# Altium PCB BMSPowerDistribution.PcbDoc (part 1 of 6)
Units mil, origin at the board's own origin, x right, y up, seen from the top; angles counter-clockwise.
Board outline 5328.74 x 5315 mil, 4 copper layers (Top Layer, Layer 1, Layer 2, Bottom Layer), stack 24.6 mil thick; 321 components, 209 nets, 1075 pads, 489 vias.
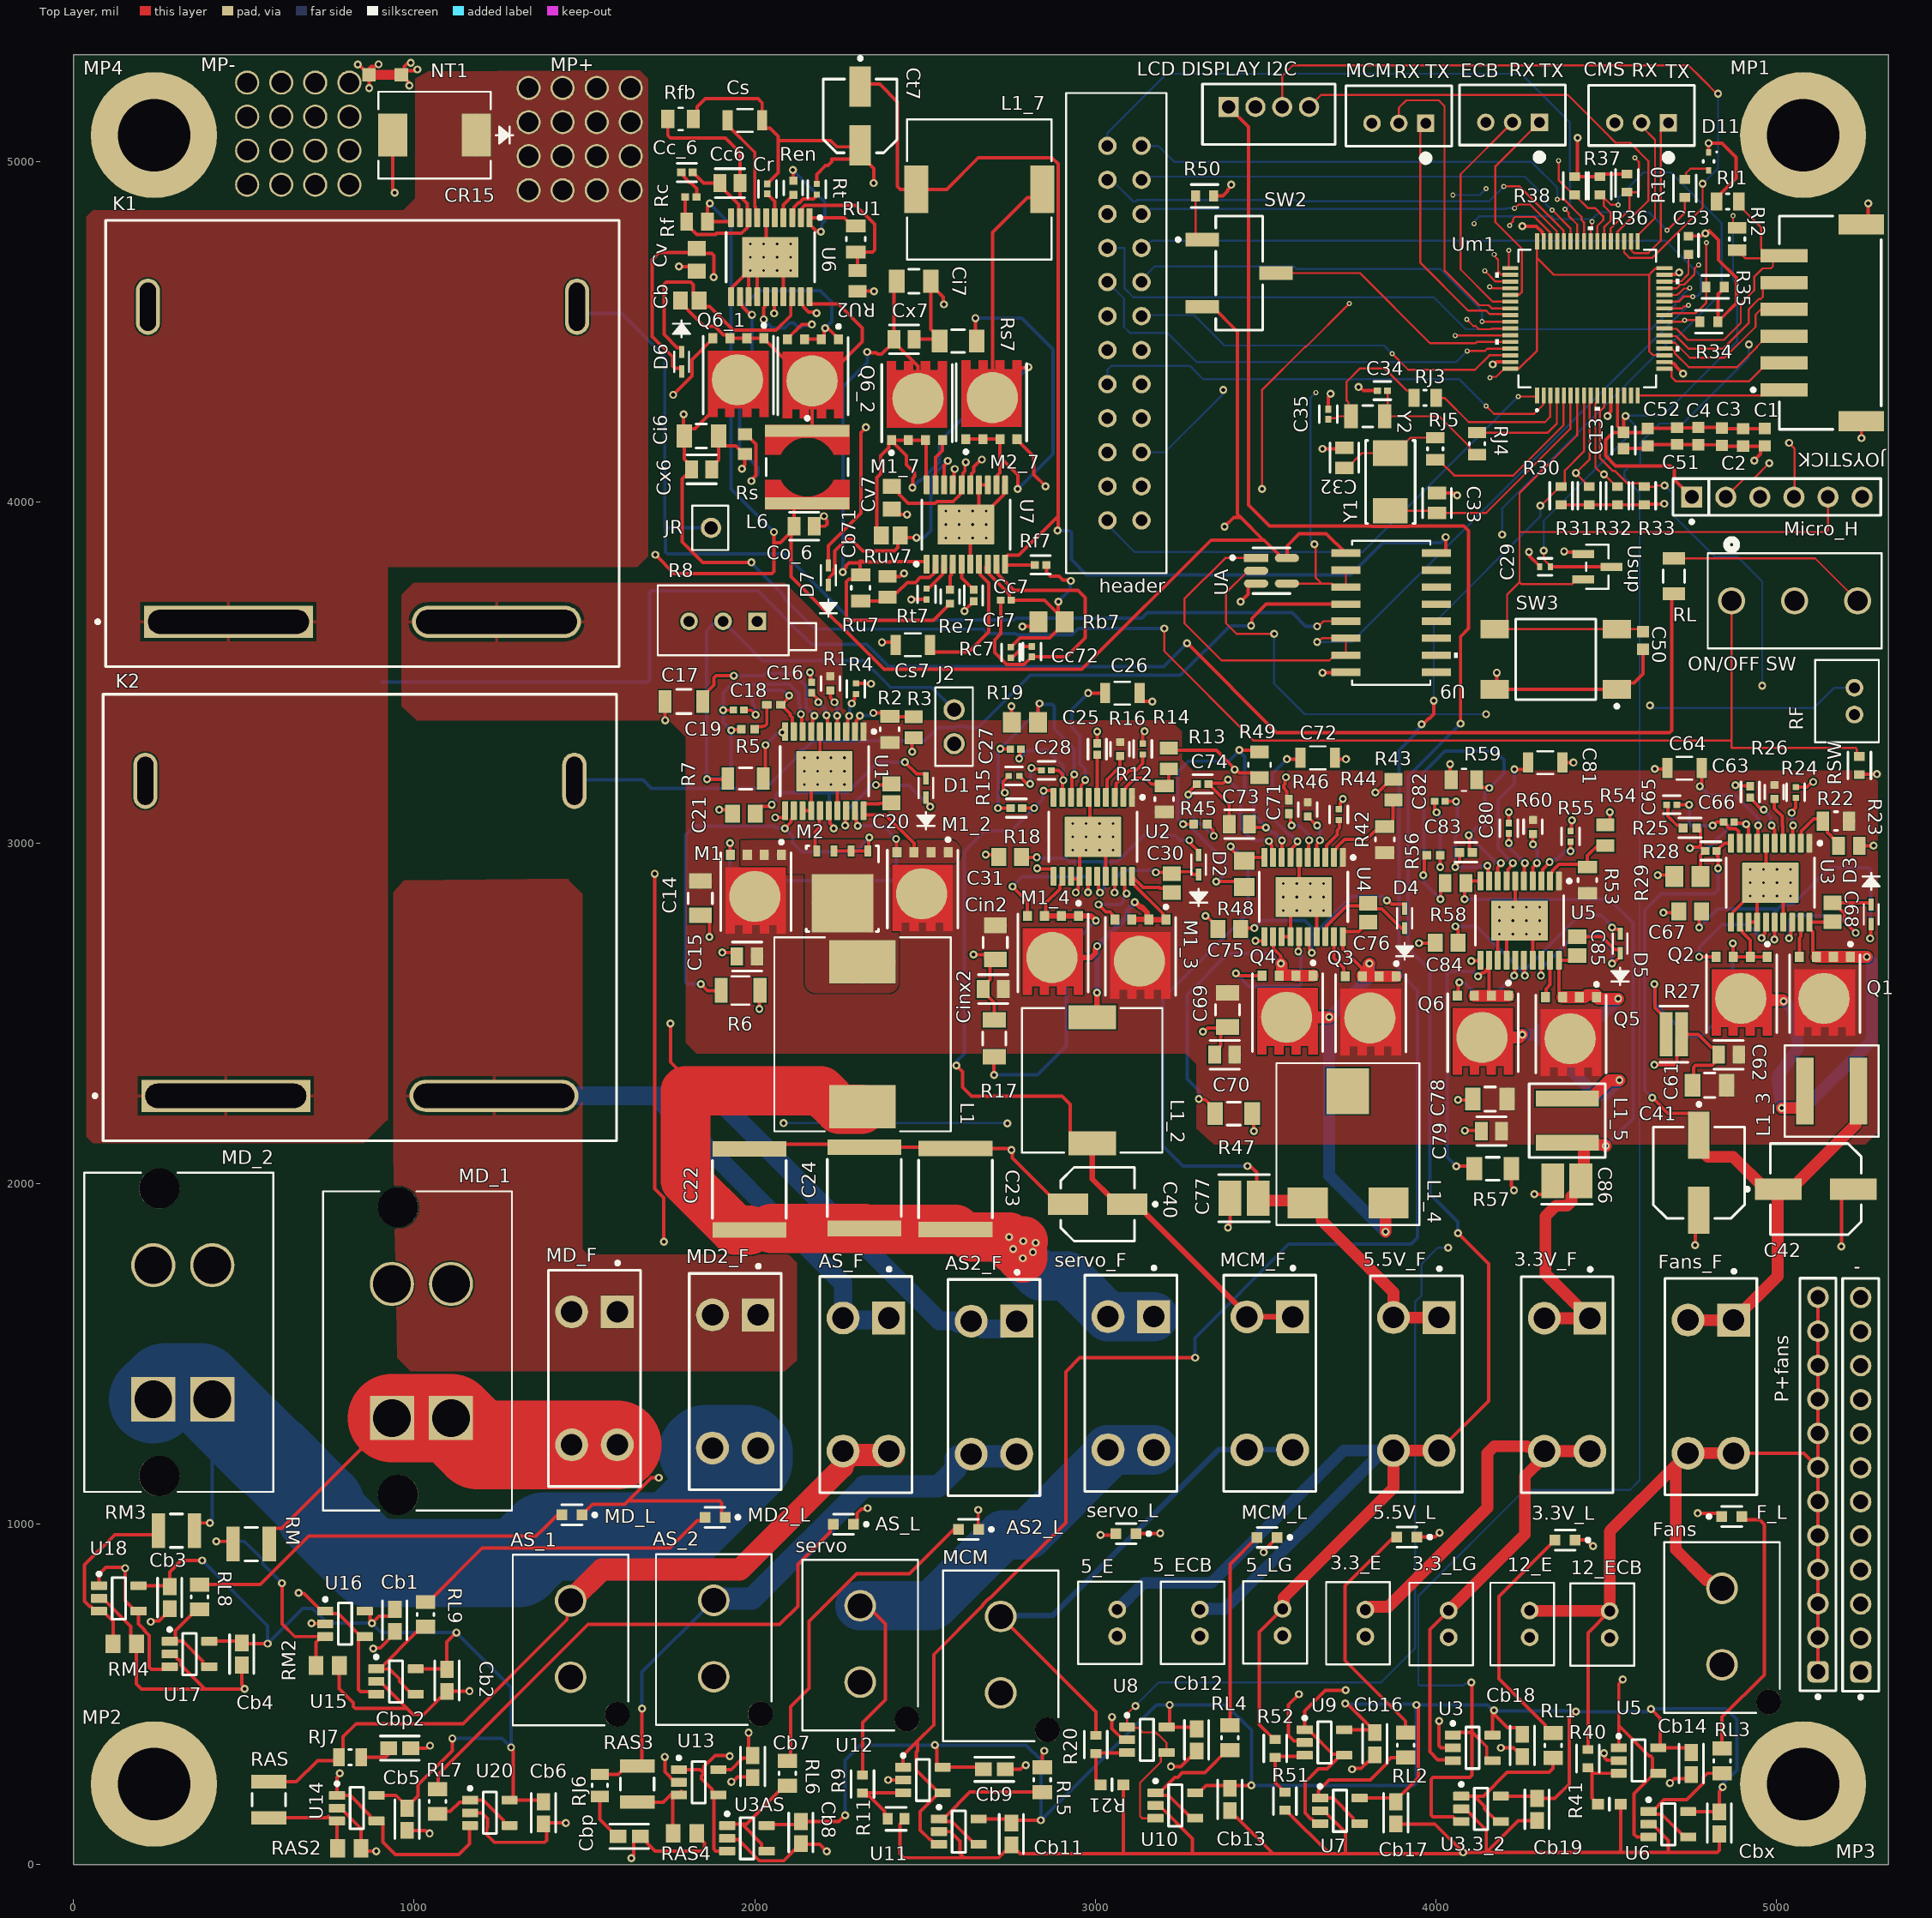
[diagram p0: Top Layer view]
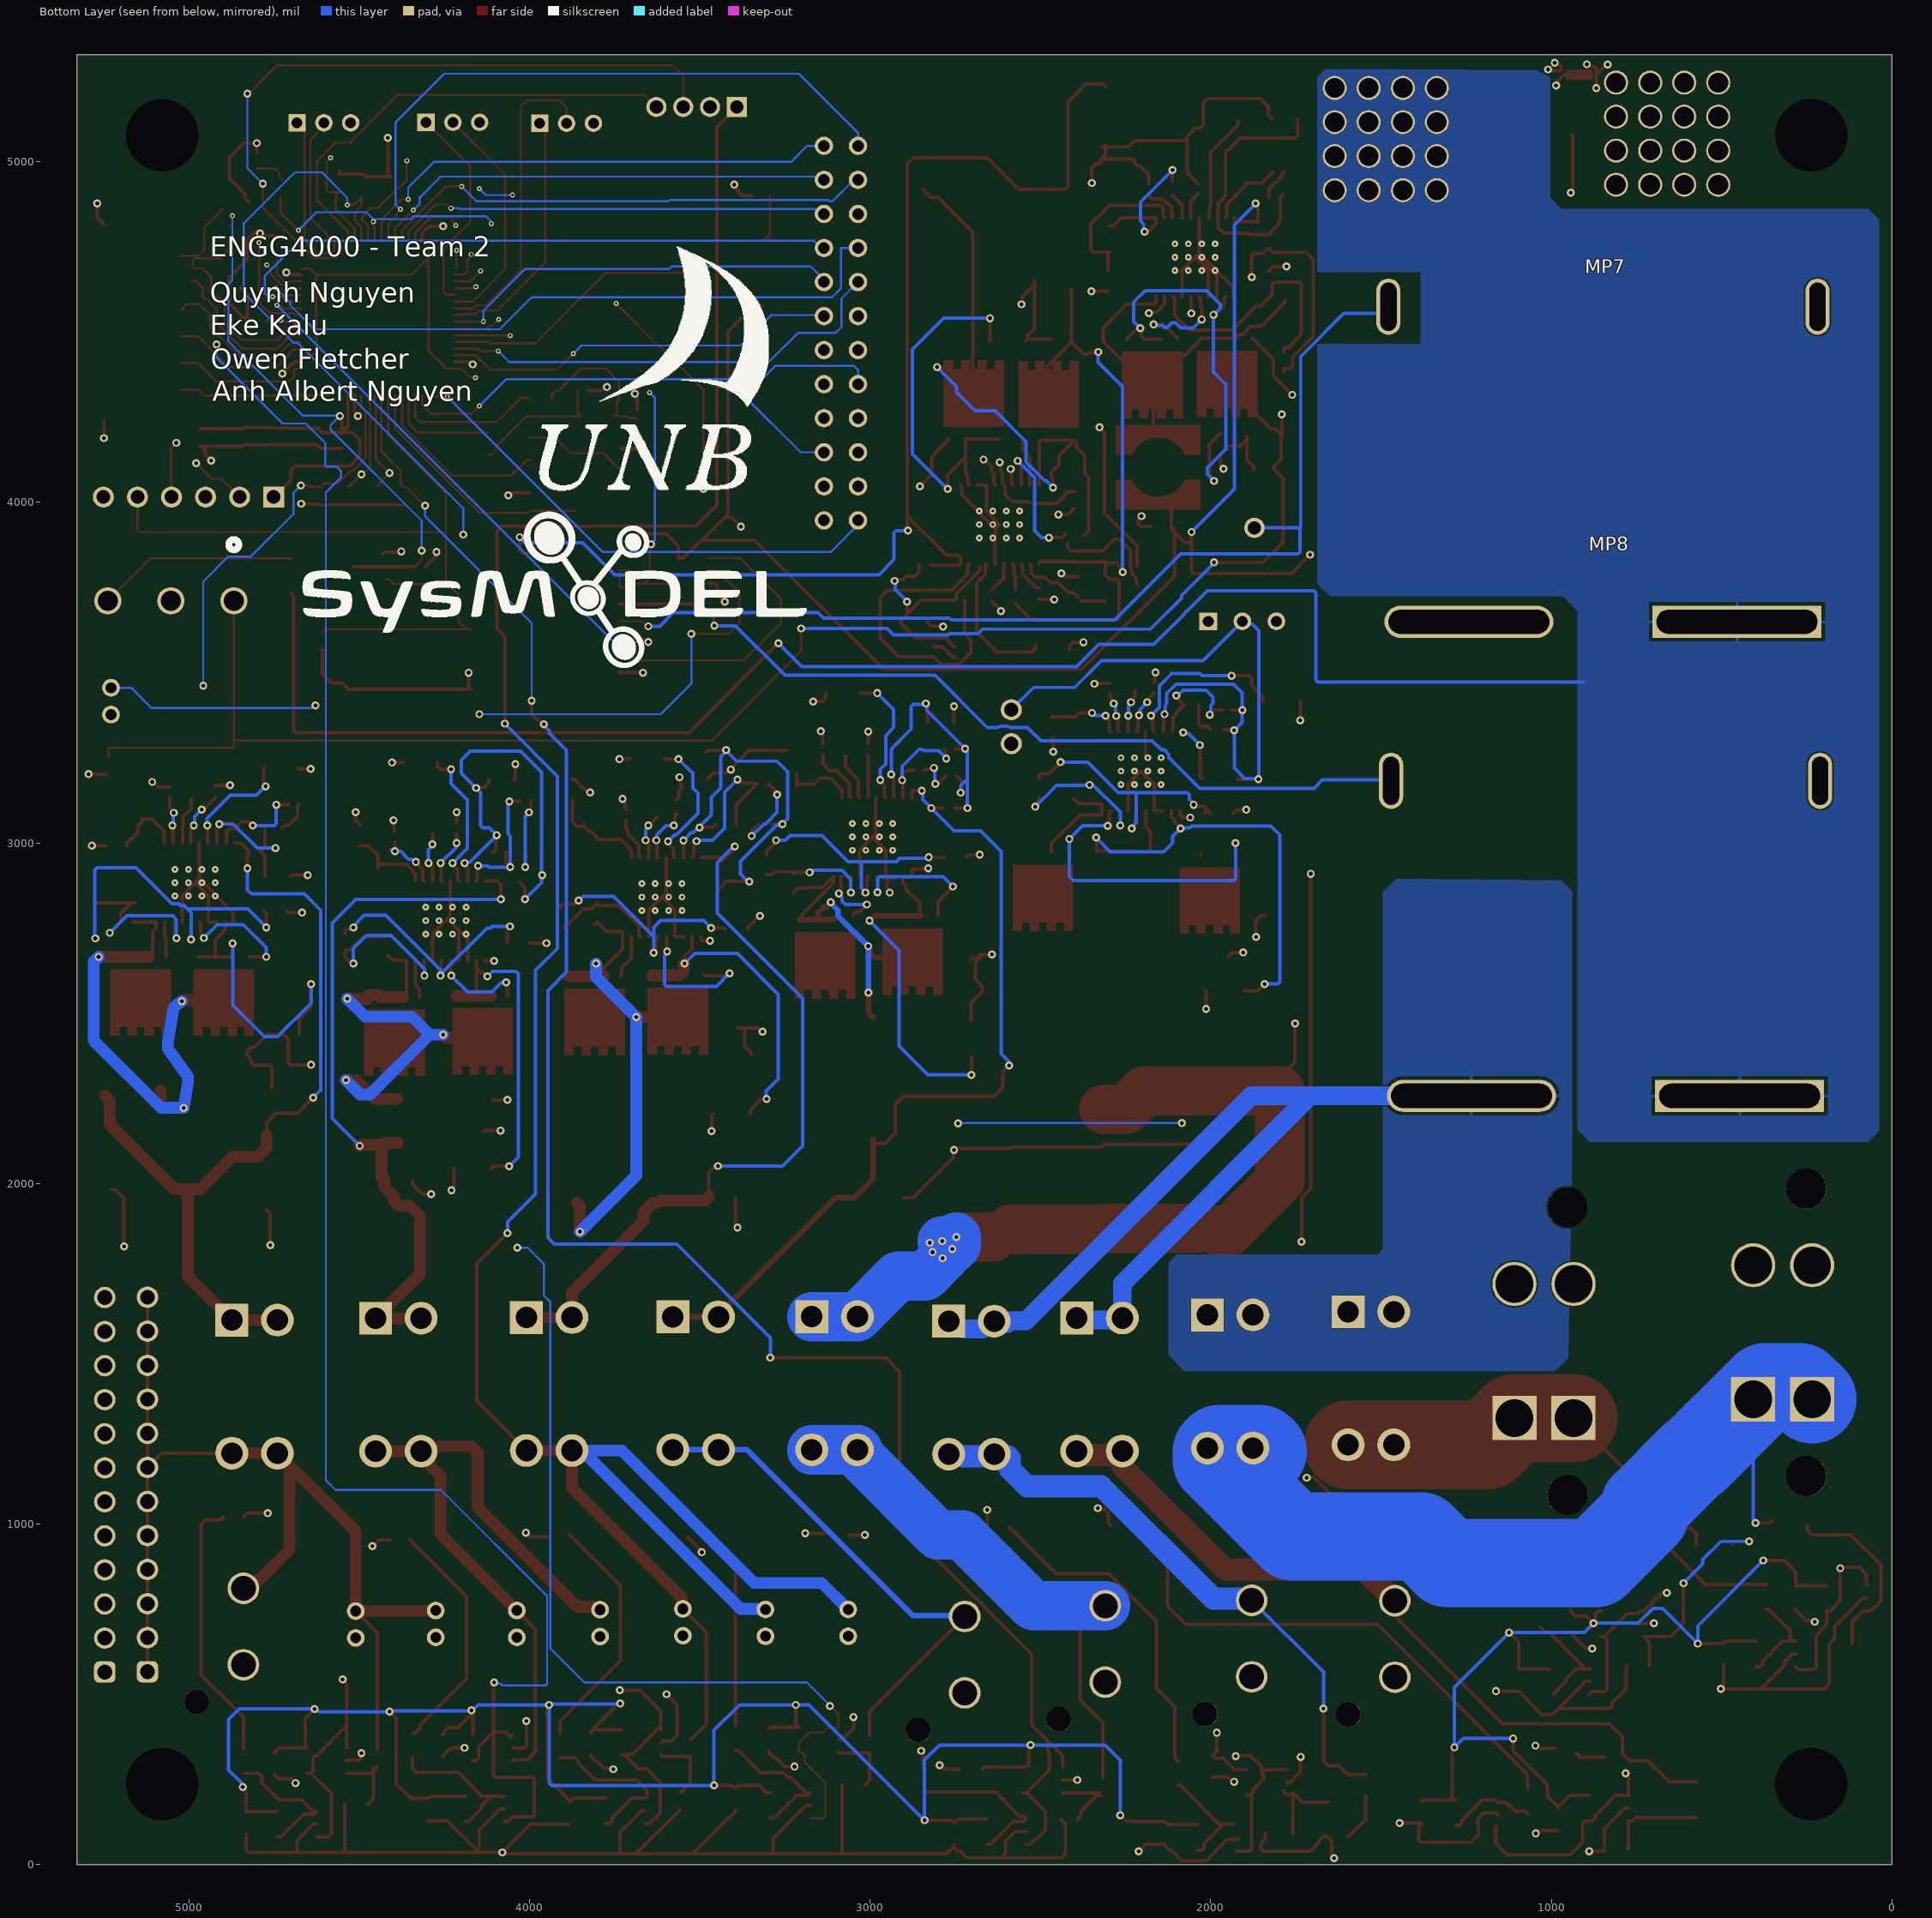
[diagram p1: Bottom Layer view, seen from below]
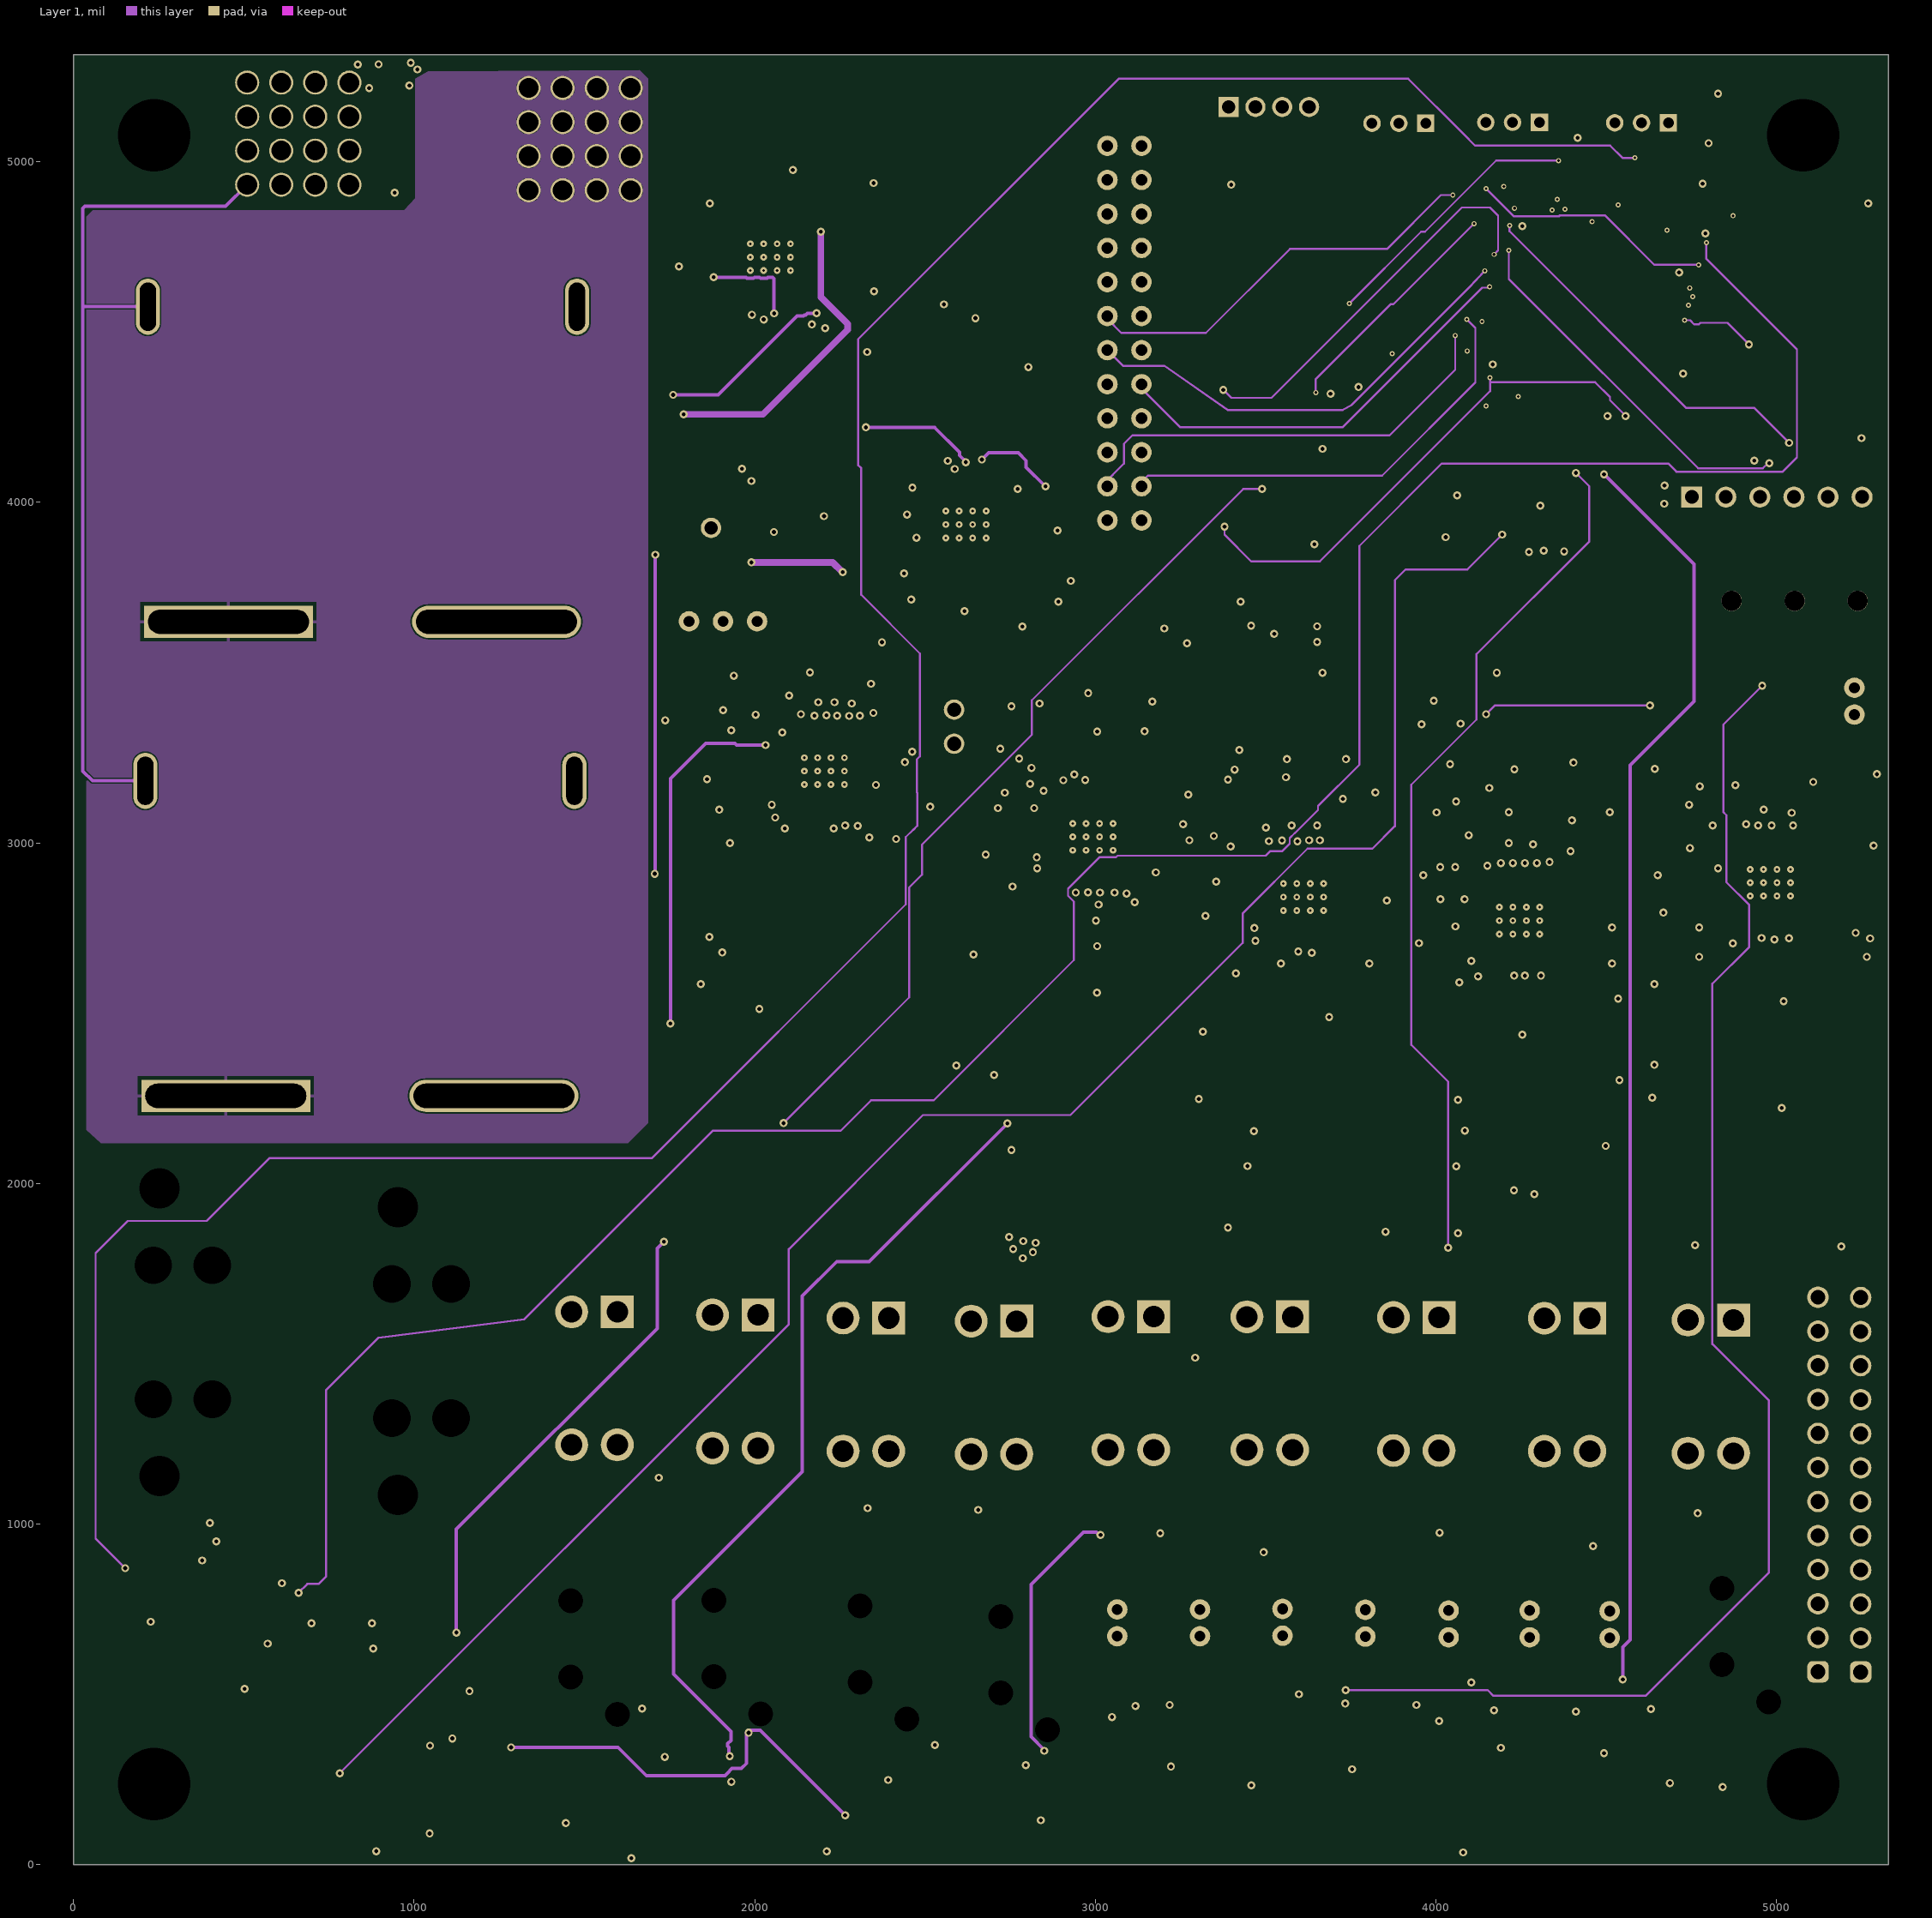
[diagram p2: Layer 1]
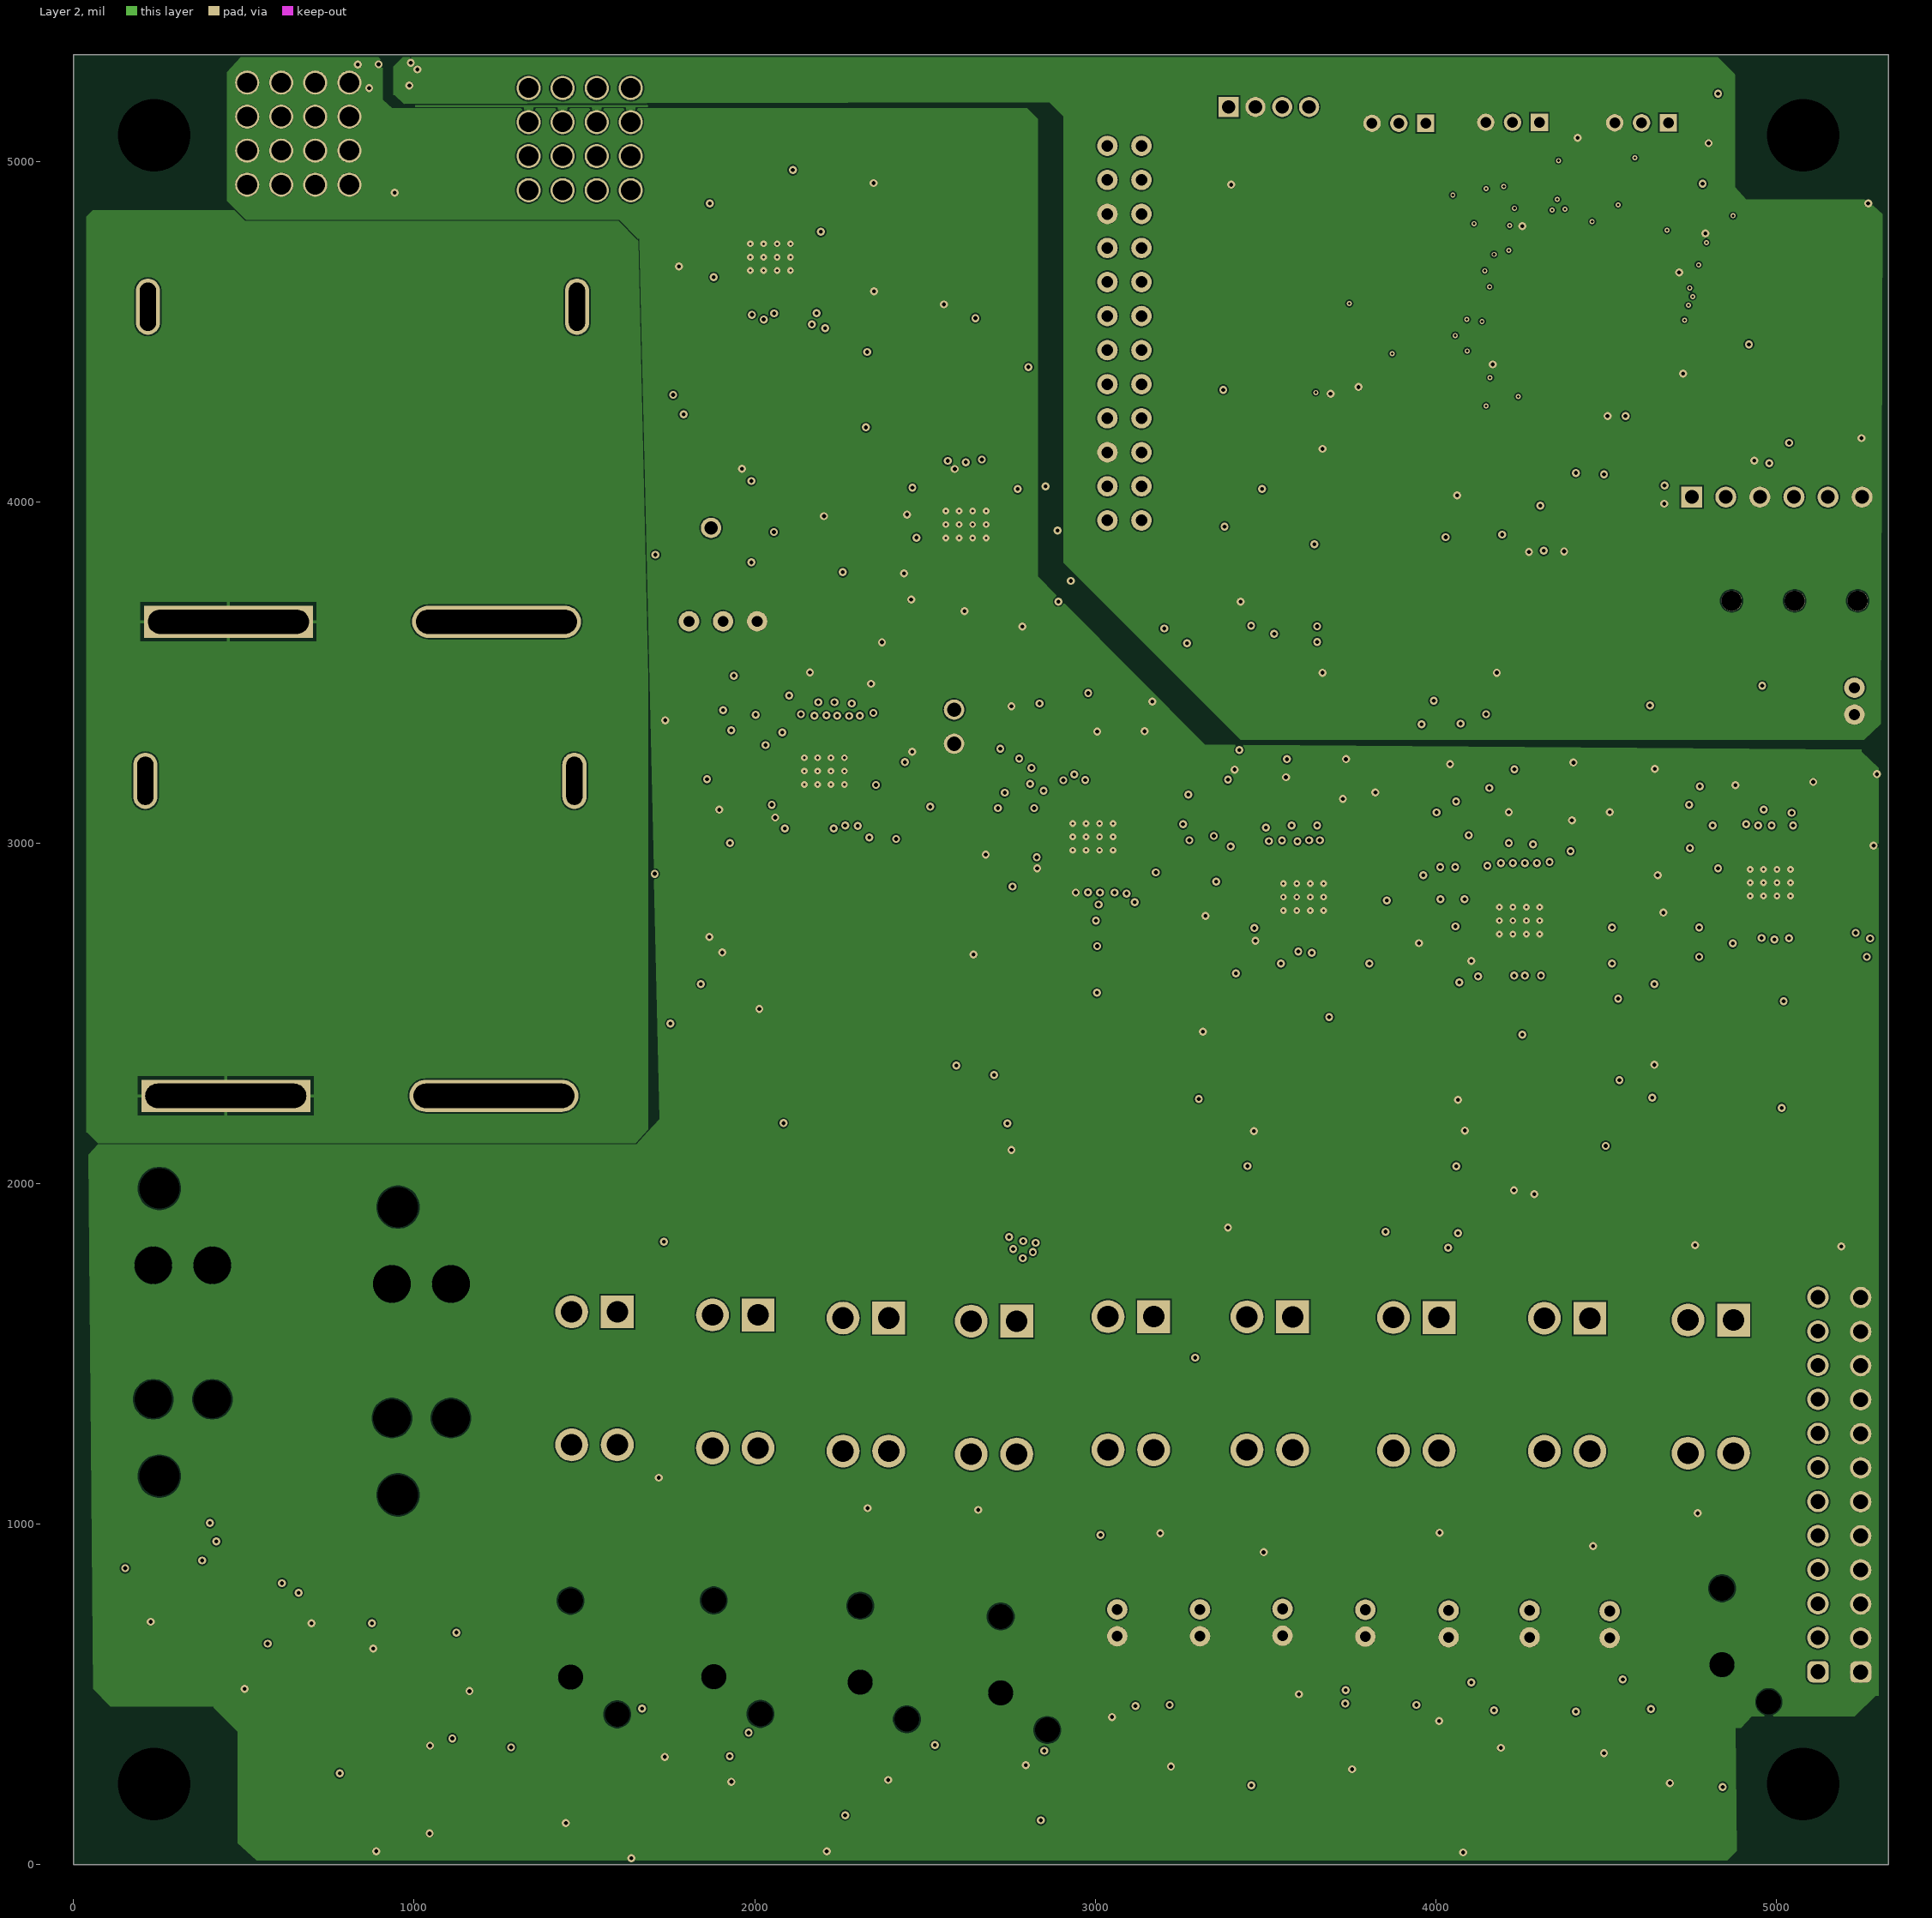
[diagram p3: Layer 2]
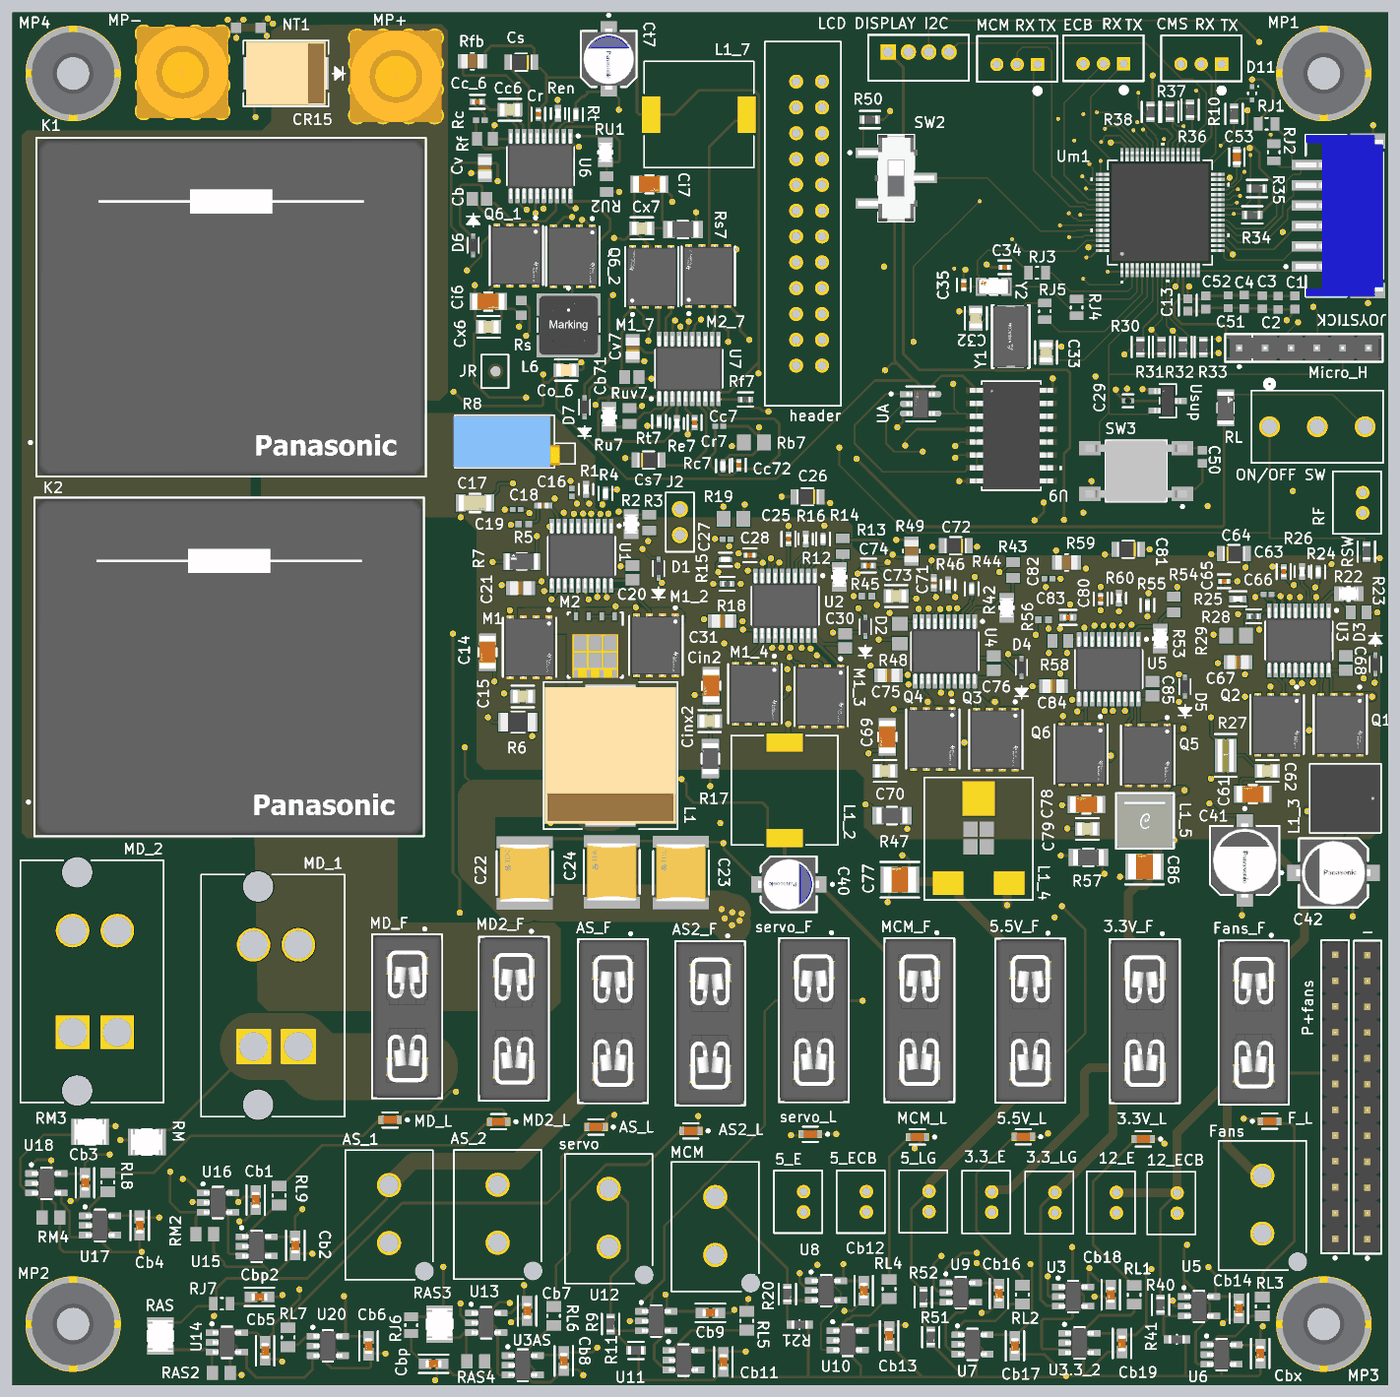
[diagram p8: 3D render of the assembled board from above, using the file's embedded part models]

## Layer stack, top to bottom
Top Solder: solder mask 0.4, Solder Resist, Dk 3.5
Top Layer: signal copper 1.6
Dielectric 2: prepreg 2.8, PP-006, Dk 4.1
Layer 1: signal copper 1.6
Dielectric 1: dielectric 12.6, FR-4, Dk 4.8
Layer 2: signal copper 1.6
Dielectric 3: prepreg 2.8, PP-006, Dk 4.1
Bottom Layer: signal copper 1.6
Bottom Solder: solder mask 0.4, Solder Resist, Dk 3.5

## Board outline
0,5315 0,0 5328.74,0 5328.74,5315

## Design rules (kind name [scope] priority, off if disabled: settings)
Clearance Polygon [ObjectKind = 'Poly'] p1: gap=15 ignorepadtopadclearanceinfootprint=TRUE
Clearance [All] p2: gap=4 ignorepadtopadclearanceinfootprint=TRUE except(5.91: SMDPad-SMDPad; 7.87: Arc-Via Track-Via SMDPad-Via THPad-Via Via-Via; 11.02: Arc-THPad Track-THPad SMDPad-THPad THPad-THPad)
Height [All] p1: minheight=0 maxheight=2000 prefheight=500
HoleSize [All] p1: absolutevalues=TRUE maxlimit=500 minlimit=1 maxpercent=80.000 minpercent=20.000
MinimumSolderMaskSliver [All] p1: minsoldermaskwidth=4
PlaneConnect [All] p1: planeconnectstyle=Direct reliefexpansion=20 reliefentries=4 reliefconductorwidth=10 reliefairgap=10
PolygonConnect [HasFootprint('FP-HE1AN-W-DC12V-Y6-MFG')] p1: connectstyle=Relief reliefconductorwidth=10 reliefentries=4 polygonreliefangle="90 Angle" airgapwidth=10
RoutingVias [All] p1: holewidth=15.98 width=34.02 viastyle="Through Hole" minholewidth=5.51 minwidth=9.45 maxholewidth=40 maxwidth=65
SilkToSolderMaskClearance [IsPad] p1: minsilkscreentomaskgap=5.91 clearancetoexposedcopper=TRUE
SolderMaskExpansion [All] p1: expansion=0.04 istentingtop=FALSE
SupplyNets "Schematic Supply Nets_5" [InNet('DGND')] p1: voltage=0.000
SupplyNets "Schematic Supply Nets_4" [InNet('+5')] p2: voltage=0.000
SupplyNets "Schematic Supply Nets_3" [InNet('12V_SUPPLY')] p3: voltage=0.000
SupplyNets "Schematic Supply Nets_2" [InNet('System+')] p4: voltage=0.000
SupplyNets "Schematic Supply Nets_1" [InNet('3.3+')] p5: voltage=0.000
SupplyNets "Schematic Supply Nets" [InNet('GND')] p6: voltage=0.000
Width [All] p1: maxlimit=270 minlimit=4 preferedwidth=10
25 further rules are at their usual default settings.

## Classes and differential pairs
component class Miccrocontroller: C1 C2 C3 C4 C13 C29 C32 C33 C34 C35 C50 C51 C52 C53 Cb Cb71 Cc6 Cc7 Cc72 Cc_6 Ci6 Ci7 CMS_U Co_6 Cr Cr7 Cs Cs7 Ct7 Cv Cv7 Cx6 Cx7 D6 D7 D11 ECB header JOYSTICK L1_7 L6 "LCD DISPLAY I2C" M1_7 M2_7 MCM Micro_H MP7 MP8 NT1 "ON/OFF SW" Q6_1 Q6_2 R10 R30 R31 R32 R33 R34 R35 R36 R37 R38 R50 Rb7 Rc Rc7 Re7 Ren Rf Rf7 Rfb RJ1 RJ2 RJ3 RJ4 RJ5 RL Rs Rs7 RSW Rt Rt7 RU1 RU2 Ru7 Ruv7 SW2 SW3 U6 U7 U9 Um1 Usup Y1 Y2
component class BuckConverters: 3.3_E 3.3_LG 3.3V_F 3.3V_L 5.5V_F 5.5V_L 5_E 5_ECB 5_LG 12_E 12_ECB - AS2_F AS2_L AS_1 AS_2 AS_F AS_L C14 C15 C16 C17 C18 C19 C20 C21 C22 C23 C24 C25 C26 C27 C28 C30 C31 C40 C41 C42 C61 C62 C63 C64 C65 C66 C67 C68 C69 C70 C71 C72 C73 C74 C75 C76 C77 C78 C79 C80 C81 C82 C83 C84 C85 C86 Cb1 Cb2 Cb3 Cb4 Cb5 Cb6 Cb7 Cb8 Cb9 Cb11 Cb12 Cb13 Cb14 Cb16 Cb17 Cb18 Cb19 Cbp Cbp2 Cbx Cin2 Cinx2 CR15 D1 D2 D3 D4 D5 F_L Fans Fans_F J2 JR K1 K2 L1 L1_2 L1_3 L1_4 L1_5 M1 M1_2 M1_3 M1_4 M2 MCM MCM_F MCM_L MD2_F MD2_L MD_1 MD_2 MD_F MP1 MP2 MP3 MP4 MP+ MP- P+fans Q1 Q2 Q3 Q4 Q5 Q6 R1 R2 R3 R4 R5 R6 R7 R8 R9 R11 R12 R13 R14 R15 R16 R17 R18 R19 R20 R21 R22 R23 R24 R25 R26 R27 R28 R29 R40 R41 R42 R43 R44 R45 R46 R47 R48 R49 R51 R52 R53 R54 R55 R56 R57 R58 R59 R60 RAS RAS2 RAS3 RAS4 Rcomp5 RF RJ6 RJ7 RL1 RL2 RL3 RL4 RL5 RL6 RL7 RL8 RL9 RM RM2 RM3 RM4 servo servo_F servo_L U1 U2 U3 U3.3_2 U3AS U4 U5 U6 U7 U8 U9 U10 U11 U12 U13 U14 U15 U16 U17 U18 U20 UA

## Components (designator, comment, footprint, x,y, rotation, side; value= is the part's Value field where it differs from the comment)
3.3_E "B2B-PH-K-SLFSN" CONN_B2B-PH-K-SLFSN_JST 3793.31,748.03 r90 top
3.3_LG "B2B-PH-K-SLFSN" CONN_B2B-PH-K-SLFSN_JST 4037.72,745.74 r90 top
3.3V_F "3568" FP-3568-MFG 4385.72,1409 r270 top
3.3V_L "LS L29K-H1J2-1-Z" FP-LS_L29K-MFG 4379.92,952.76 r180 top
5.5V_F "3568" FP-3568-MFG 3942.72,1411 r270 top
5.5V_L "LS L29K-H1J2-1-Z" FP-LS_L29K-MFG 3915.35,961.61 r180 top
5_E "B2B-PH-K-SLFSN" CONN_B2B-PH-K-SLFSN_JST 3064.68,748.94 r90 top
5_ECB "B2B-PH-K-SLFSN" CONN_B2B-PH-K-SLFSN_JST 3307.68,748.94 r90 top
5_LG "B2B-PH-K-SLFSN" CONN_B2B-PH-K-SLFSN_JST 3550.08,750.54 r90 top
12_E "B2B-PH-K-SLFSN" CONN_B2B-PH-K-SLFSN_JST 4275.72,745.74 r90 top
12_ECB "B2B-PH-K-SLFSN" CONN_B2B-PH-K-SLFSN_JST 4510.72,744 r90 top
- "61301211121" 61301211121 5247.72,1115 r90 top
AS2_F "3568" FP-3568-MFG 2702.76,1400.59 r270 top
AS2_L "LS L29K-H1J2-1-Z" FP-LS_L29K-MFG 2627.95,984.25 r180 top
AS_1 "1720650202" CONN_SD-768290002_02_MOL 1459.45,774.41 r180 top
AS_2 "1720650202" CONN_SD-768290002_02_MOL 1879.92,775.59 r180 top
AS_F "3568" FP-3568-MFG 2326.77,1409.45 r270 top
AS_L "LS L29K-H1J2-1-Z" FP-LS_L29K-MFG 2260.83,999.02 r180 top
C1 "06035C104KAT4A" CAPC1608X90X35LL15T15 4966.54,4191.93 r90 top
C2 "06035C104KAT4A" CAPC1608X90X35LL15T15 4902.56,4190.94 r90 top
C3 "06035C104KAT4A" CAPC1608X90X35LL15T15 4840.55,4192.91 r90 top
C4 "06035C104KAT4A" CAPC1608X90X35LL15T15 4770.67,4194.88 r90 top
C13 "GRM188R61E475KE11D" FP-GRM188-0_15-IPC_C 4551.72,4182 r270 top
C14 "GRM31CR71H475KA12L" FP-GRM31C-0_2-e0_3_0_8-IPC_C 1840.55,2837.63 r270 top
C15 "C0805C104M5RACTU" FP-C0805C-DN-MFG 1977.33,2666.42 r180 top value="0.10 μF"
C16 "GRM1555C1H301GA01D" CAPC1005X55X25LL05T10 2167.32,3456.3 r270 top
C17 "C1206C333J1GACTU" FP-C1206C-EB-MFG 1792.32,3415.35 r180 top value="33,000 pF"
C18 "UMK105CG181JV-F" "CAP_UMK105 CG080CV-F_TAY" 2056.27,3405.51 r0 top
C19 "GRM1555C1E5R1CA01D" CAPC1005X55X25LL05T10 1953.2,3390.25 r180 top
C20 "08053C104K4T2A" CAPC2013X140X50LL20T25 2401.57,3145.67 r90 top
C21 "TMK212BJ105KG-T" CAP_TMK212BJ105KG-T_TAY 1968.63,3085.63 r0 top
C22 "CGA9N3X7R1C476M230KB" FP-CGA9P-IPC_A 1984.25,1982.28 r90 top
C23 "CGA9N3X7R1C476M230KB" FP-CGA9P-IPC_A 2589.72,1984 r90 top
C24 "CGA9N3X7R1C476M230KB" FP-CGA9P-IPC_A 2321.72,1987 r90 top
C25 "UMK105CG271JV-F" FP-0402-L_1_0_0_05-W_0_5-IPC_B 3005.91,3275.59 r90 top
C26 "CGA4J2C0G1H333J125AA" CAP_2012_TDK-M 3079.65,3439.85 r180 top
C27 "GRM1555C1E5R1CA01D" CAPC1005X55X25LL05T10 2766.14,3275.59 r180 top
C28 "GRM1555C1H101FA01D" FP-GRM155-0_05-IPC_C 2856.72,3213 r0 top
C29 "GRM155R71C104KA88D" FP-GRM15-MFG 4320.87,3811.02 r180 top value=0.10μF
C30 "08053C104K4T2A" CAPC2013X140X50LL20T25 3225.39,2881.89 r90 top
C31 "TMK212BJ105KG-T" CAP_TMK212BJ105KG-T_TAY 2750.06,2958.5 r0 top
C32 "C0805C180J5GACTU" FP-C0805C-DN-MFG 3731.56,4131 r270 top value="18 pF"
C33 "C0805C180J5GACTU" FP-C0805C-DN-MFG 4003.56,3998.53 r270 top value="18 pF"
C34 "GJM1555C1H1R5BB01D" FP-GJM155-0_05-IPC_C 3843.56,4328 r0 top
C35 "GJM1555C1H1R5BB01D" FP-GJM155-0_05-IPC_C 3684.56,4258.9 r270 top
C40 "25SVPF27MX" FP-OS-CON-SMT-B6-MFG 3006.89,1938.98 r180 top
C41 "35SVPF22M" FP-OS-CON-SMT-C6-MFG 4772.7,2031.52 r270 top
C42 "35SVPF22M" FP-OS-CON-SMT-C6-MFG 5115.94,1983.29 r0 top
C50 "06035C104KAT4A" CAPC1608X90X35LL15T15 4608.27,3594.49 r90 top
C51 "C0603C105K3RACTU" CAPC1608X87X35LL15T15 4708.66,4194.88 r90 top
C52 "06035C104KAT4A" CAPC1608X90X35LL15T15 4622.05,4191.93 r270 top
C53 "GRM188R71A225KE15D" FP-GRM188-0_1-e0_2_0_5-MFG 4742.13,4754.92 r90 top
C61 "GRM31CR71H475KA12L" FP-GRM31C-0_2-e0_3_0_8-IPC_C 4804.13,2288.39 r180 top
C62 "C0805C104M5RACTU" FP-C0805C-DN-MFG 4860.24,2377.95 r180 top value="0.10 μF"
C63 "UMK105CG271JV-F" FP-0402-L_1_0_0_05-W_0_5-IPC_B 4923.23,3149.61 r90 top
C64 "CGA4J2C0G1H333J125AA" CAP_2012_TDK-M 4730.31,3219.49 r0 top
C65 "GRM1555C1H101FA01D" FP-GRM155-0_05-IPC_C 4692.91,3112.2 r0 top
C66 "GRM1555C1E5R1CA01D" CAPC1005X55X25LL05T10 4860.74,3061.44 r0 top
C67 "TMK212BJ105KG-T" CAP_TMK212BJ105KG-T_TAY 4746.64,2799.22 r0 top
C68 "08053C104K4T2A" CAPC2013X140X50LL20T25 5164.64,2796.22 r90 top
C69 "GRM31CR71H475KA12L" FP-GRM31C-0_2-e0_3_0_8-IPC_C 3388.72,2509.77 r270 top
C70 "C0805C104M5RACTU" FP-C0805C-DN-MFG 3379.92,2377.95 r180 top value="0.10 μF"
C71 "UMK105CG181JV-F" "CAP_UMK105 CG080CV-F_TAY" 3568.9,3106.3 r270 top
C72 "CGA4J2C0G1H333J125AA" CAP_2012_TDK-M 3653.54,3250 r180 top
C73 "C0805C100M4GACTU" FP-C0805C-DN-MFG 3423.23,3055.12 r180 top value="10 pF"
C74 "UMK105CG271JV-F" FP-0402-L_1_0_0_05-W_0_5-IPC_B 3315.8,3173.23 r0 top
C75 "TMK212BJ105KG-T" CAP_TMK212BJ105KG-T_TAY 3393.57,2747.33 r0 top
C76 "08053C104K4T2A" CAPC2013X140X50LL20T25 3801.18,2795.28 r90 top
C77 "GRM32ER61C476KE15L" FP-GRM32E-0_3-0_2-IPC_C 3436.98,1956.69 r180 top
C78 "GRM31CR71H475KA12L" FP-GRM31C-0_2-e0_3_0_8-IPC_C 4159.45,2248.03 r180 top
C79 "C0805C104M5RACTU" FP-C0805C-DN-MFG 4163.39,2153.54 r180 top value="0.10 μF"
C80 "GRM1555C1H101FA01D" FP-GRM155-0_05-IPC_C 4214.57,3043.31 r90 top
C81 "CGA4J2C0G1H333J125AA" CAP_2012_TDK-M 4321.72,3236 r180 top
C82 "GRM1555C1E120JA01D" CAPC1005X55X25LL05T10 4012.33,3122.04 r0 top
C83 "GRM1555C1H391JA01J" FP-GRM155-0_05-IPC_A 4088.58,2972.44 r180 top
C84 "TMK212BJ105KG-T" CAP_TMK212BJ105KG-T_TAY 4032.16,2706.5 r0 top
C85 "08053C104K4T2A" CAPC2013X140X50LL20T25 4415.35,2696.85 r90 top
C86 "GRM32ER61C476KE15L" FP-GRM32E-0_3-0_2-IPC_C 4384.79,2007.5 r180 top
Cb "08053C104K4T2A" CAPC2013X140X50LL20T25 1809.44,4593.13 r0 top
Cb1 "GCJ188R72A104KA01D" FP-GCJ188-0_2-IPC_A 943.24,716.69 r270 top
Cb2 "GCJ188R72A104KA01D" FP-GCJ188-0_2-IPC_A 1096.46,540.34 r270 top
Cb3 "GCJ188R72A104KA01D" FP-GCJ188-0_2-IPC_A 282.48,783.48 r270 top
Cb4 "GCJ188R72A104KA01D" FP-GCJ188-0_2-IPC_A 494.09,618.11 r270 top
Cb5 "GCJ188R72A104KA01D" FP-GCJ188-0_2-IPC_A 979.72,132.5 r270 top
Cb6 "GCJ188R72A104KA01D" FP-GCJ188-0_2-IPC_A 1379.98,151.61 r270 top
Cb7 "GCJ188R72A104KA01D" FP-GCJ188-0_2-IPC_A 1994.09,287.38 r270 top
Cb8 "GCJ188R72A104KA01D" FP-GCJ188-0_2-IPC_A 2135.83,93.48 r270 top
Cb9 "GCJ188R72A104KA01D" FP-GCJ188-0_2-IPC_A 2703.76,279.53 r0 top
Cb11 "GCJ188R72A104KA01D" FP-GCJ188-0_2-IPC_A 2753.94,89.55 r270 top
Cb12 "GCJ188R72A104KA01D" FP-GCJ188-0_2-IPC_A 3297.57,365.64 r270 top
Cb13 "GCJ188R72A104KA01D" FP-GCJ188-0_2-IPC_A 3395.67,190.94 r270 top
Cb14 "GCJ188R72A104KA01D" FP-GCJ188-0_2-IPC_A 4750,296.28 r270 top
Cb16 "GCJ188R72A104KA01D" FP-GCJ188-0_2-IPC_A 3820.87,354.33 r270 top
Cb17 "GCJ188R72A104KA01D" FP-GCJ188-0_2-IPC_A 3882.87,151.57 r270 top
Cb18 "GCJ188R72A104KA01D" FP-GCJ188-0_2-IPC_A 4253.94,349.39 r270 top
Cb19 "GCJ188R72A104KA01D" FP-GCJ188-0_2-IPC_A 4297.24,161.42 r270 top
Cb71 "08053C104K4T2A" CAPC2013X140X50LL20T25 2399.61,3902.56 r0 top
Cbp "GCJ188R72A104KA01D" FP-GCJ188-0_2-IPC_A 1631.89,82.68 r0 top
Cbp2 "GCJ188R72A104KA01D" FP-GCJ188-0_2-IPC_A 957.66,341.54 r0 top
Cbx "GCJ188R72A104KA01D" FP-GCJ188-0_2-IPC_A 4832.68,122.05 r270 top (schematic designator Cb15)
Cc6 "C0805C100M4GACTU" FP-C0805C-DN-MFG 1927.51,4937.85 r180 top value="10 pF"
Cc7 "GRM1555C1E5R1CA01D" CAPC1005X55X25LL05T10 2738.19,3712.6 r0 top
Cc72 "GRM1555C1H101FA01D" FP-GRM155-0_05-IPC_C 2813.97,3562.06 r270 top
Cc_6 "UMK105CG271JV-F" FP-0402-L_1_0_0_05-W_0_5-IPC_B 1801.38,4968.85 r0 top
Ci6 "GRM31CR71H475KA12L" FP-GRM31C-0_2-e0_3_0_8-IPC_C 1843.44,4195.13 r0 top
Ci7 "GRM31CR71H475KA12L" FP-GRM31C-0_2-e0_3_0_8-IPC_C 2467.52,4649.58 r0 top
Cin2 "GRM31CR71H475KA12L" FP-GRM31C-0_2-e0_3_0_8-IPC_C 2706.69,2707.71 r270 top
Cinx2 "C0805C104M5RACTU" FP-C0805C-DN-MFG 2700.79,2570.87 r180 top value="0.10 μF"
CMS "B3B-PH-K-S(LF)(SN)" JST-B3B-PH-K-S-3_V 4604.3,5136.65 r180 top (schematic designator J16)
Co_6 "C0805C475K8PACTU" FP-C0805C475K8PACTU-MFG 2145.44,3930.13 r0 top
Cr "GRM1555C1H101FA01D" FP-GRM155-0_05-IPC_C 2037.51,4920.85 r90 top
Cr7 "UMK105CG271JV-F" FP-0402-L_1_0_0_05-W_0_5-IPC_B 2642.72,3726.89 r270 top
CR15 "SMCJ75A-13-F" SMC_DIO 1059.95,5078.74 r180 top
Cs "CGA4J2C0G1H333J125AA" CAP_2012_TDK-M 1971.46,5122.05 r180 top
Cs7 "CGA4J2C0G1H333J125AA" CAP_2012_TDK-M 2464.57,3581.69 r0 top
Ct7 "25SVPF27MX" FP-OS-CON-SMT-B6-MFG 2310.04,5134.84 r270 top
Cv "TMK212BJ105KG-T" CAP_TMK212BJ105KG-T_TAY 1830.44,4713.13 r90 top
Cv7 "TMK212BJ105KG-T" CAP_TMK212BJ105KG-T_TAY 2402.56,4013.91 r90 top
Cx6 "C0805C104M5RACTU" FP-C0805C-DN-MFG 1844.44,4097.13 r0 top value="0.10 μF"
Cx7 "C0805C104M5RACTU" FP-C0805C-DN-MFG 2438.44,4479.13 r0 top value="0.10 μF"
D1 "BAS516" SOD523_NEX 2502.95,3161.42 r90 top
D2 "BAS516" SOD523_NEX 3303.64,2936.02 r90 top
D3 "BAS516" SOD523_NEX 5278.54,2790.35 r270 top
D4 "BAS516" SOD523_NEX 3908.46,2778.54 r90 top
D5 "BAS516" SOD523_NEX 4541.34,2704.72 r90 top
D6 "BAS516" SOD523_NEX 1785.43,4413.39 r270 top
D7 "BAS516" SOD523_NEX 2216.44,3786.13 r90 top
D11 "RB521S30T1G" ONSC-SOD-523-2-502-01_V 4801.18,5001.57 r270 top
ECB "B3B-PH-K-S(LF)(SN)" JST-B3B-PH-K-S-3_V 4225.56,5138 r180 top (schematic designator J14)
F_L "LS L29K-H1J2-1-Z" FP-LS_L29K-MFG 4869.09,1021.65 r0 top (schematic designator Fans_L)
Fans "1720650202" CONN_SD-768290002_02_MOL 4840.72,811 r180 top
Fans_F "3568" FP-3568-MFG 4807.65,1403.28 r270 top
header "SFH11-PBPC-D12-ST-BK" CONN_SFH11-PBPC-D12-ST-BK 3135.83,5047.24 r270 top
J2 "PPTC021LFBN-RC" "CONN2_LFBN-RC_SUL - DUPLICATE" 2585.63,3391.34 r270 top
JOYSTICK "S6B-PH-SM4-TB(LF)(SN)" JST-S6B-PH-SM4-TB(LF)(SN)_V 5135.83,4527.56 r90 top (schematic designator J15)
JR "SSQ-101-03-G-S" CON1_1X1_TU_SSQ 1872.05,3925.2 r90 top
K1 "HE1AN-W-DC12V-Y6" FP-HE1AN-W-DC12V-Y6-MFG 848.43,4173.23 r180 top
K2 "HE1AN-W-DC12V-Y6" FP-HE1AN-W-DC12V-Y6-MFG 840.72,2781 r180 top
L1 "IHLP5050FDER1R8M01" IND_IHLP_5050_FD_VIS 2316.93,2437.99 r90 top
L1_2 "MSS1038-123MLB" IND_MSS1038_COC 2991.14,2303.15 r90 top
L1_3 "XAL6060-562MEB" IND_XAL6060_COC 5162.4,2271.65 r180 top
L1_4 "SER1052-402MLB" IND_SER1052_COC 3742.13,2118.11 r90 top
L1_5 "XAL5030-222MEB" FP-XAL5030-222MEB-MFG 4386.16,2184.5 r270 top
L1_7 "MSS1038-123MLB" IND_MSS1038_COC 2659.45,4919.29 r0 top
L6 "744053270" WE-TPC_5828 2154.44,4103.43 r0 top
"LCD DISPLAY I2C" "B4B-PH-K-S(LF)(SN)" JST-B4B-PH-K-S_V 3509.84,5139.76 r0 top (schematic designator J17)
M1 "CSD18537NQ5A" FP-DQJ0008A-MFG 2003.48,2856.78 r270 top
M1_2 "CSD18537NQ5A" FP-DQJ0008A-MFG 2492.92,2864.17 r270 top
M1_3 "CSD18537NQ5A" FP-DQJ0008A-MFG 3132.68,2666.34 r270 top
M1_4 "CSD18537NQ5A" FP-DQJ0008A-MFG 2875.98,2677.17 r270 top
M1_7 "CSD18537NQ5A" FP-DQJ0008A-MFG 2476.68,4291.36 r90 top
M2 "CSD16556Q5B" DNK0008A 2257.87,2865.35 r270 top
M2_7 "CSD18537NQ5A" FP-DQJ0008A-MFG 2695.44,4294.13 r90 top
MCM "B3B-PH-K-S(LF)(SN)" JST-B3B-PH-K-S-3_V 3891.56,5134.99 r180 top (schematic designator J13)
MCM "1720650202" CONN_SD-768290002_02_MOL 2722.44,728.35 r180 top (schematic designator J8)
MCM_F "3568" FP-3568-MFG 3512.72,1413 r270 top
MCM_L "LS L29K-H1J2-1-Z" FP-LS_L29K-MFG 3504.92,960.63 r180 top
MD2_F "3568" FP-3568-MFG 1942.91,1418.31 r270 top
MD2_L "LS L29K-H1J2-1-Z" FP-LS_L29K-MFG 1883.86,1019.68 r180 top (schematic designator MD_L)
MD_1 "428192233" CON_428192233 1108.27,1311.02 r270 top
MD_2 "428192233" CON_428192233 407.48,1366.14 r270 top
MD_F "3568" FP-3568-MFG 1529.53,1427.56 r270 top
MD_L "LS L29K-H1J2-1-Z" FP-LS_L29K-MFG 1463.58,1026.57 r180 top (schematic designator LED2)
Micro_H "22-28-4060" FP-22-28-4060-MFG 5001.72,4016 r0 top
MP1 "9774050482R" 9774050482 5078.74,5078.74 r0 top
MP2 "9774050482R" 9774050482 236.22,236.22 r0 top
MP3 "9774050482R" 9774050482 5078.74,236.22 r0 top
MP4 "9774050482R" 9774050482 236.22,5078.74 r180 top
MP7 "501100B00000G" FP-501100B00000G-MFG 844.49,4515.75 r180 bottom
MP8 "501100B00000G" FP-501100B00000G-MFG 816.93,4043.31 r0 bottom
MP+ "7461147" "7461147_CHEMICAL SURFACE" 1486.22,5066.93 r0 top
MP- "7461147" "7461147_CHEMICAL SURFACE" 659.84,5083.07 r0 top
NT1 "Nettie_SMD" NETTIE_SMD 682.6,5305.91 r180 top net-tie
"ON/OFF SW" "100SP1T1B4M2QE" 100SP1T1_EWI 4868.68,3710.98 r90 top
P+fans "61301211121" 61301211121 5122.46,1115.97 r90 top
Q1 "CSD18534Q5A" FP-DQJ0008A-MFG 5142.52,2557.08 r270 top
Q2 "CSD18534Q5A" FP-DQJ0008A-MFG 4898.43,2557.08 r270 top
Q3 "CSD18537NQ5A" FP-DQJ0008A-MFG 3809.06,2500 r270 top
Q4 "CSD18534Q5A" FP-DQJ0008A-MFG 3564.76,2501.87 r270 top
Q5 "CSD18537NQ5A" FP-DQJ0008A-MFG 4397.05,2438.88 r270 top
Q6 "CSD18534Q5A" FP-DQJ0008A-MFG 4138.39,2442.82 r270 top
Q6_1 "CSD18537NQ5A" FP-DQJ0008A-MFG 1952.2,4373.91 r270 top
Q6_2 "CSD18534Q5A" FP-DQJ0008A-MFG 2171.2,4370.91 r270 top
R1 "CRCW04021M00FKED" FP-CRCW0402-e3-MFG 2222.44,3468.5 r270 top
R2 "CRCW080541K2FKEA" Vishay_CRCW0805-e3_MFG 2396.72,3333.61 r90 top
R3 "ERJ-6ENF2491V" RESC2013X70X40LL20T20 2466.54,3339.57 r90 top
R4 "CRCW04025K23FKED" FP-CRCW0402-e3-IPC_C 2297.24,3452.84 r90 top
R5 "CRCW0402102KFKED" RESC1005X40X25ML05T05 1980.4,3334 r0 top
R6 "CSNL1206FT3L00" STA_CSNL1206_STP 1958.66,2566.93 r180 top
R7 "CRCW120656K0FKEA" FP-CRCW1206-e3-IPC_C 1973.43,3188.98 r180 top
R8 "3296X-1-102LF" POT_3296X 2007.29,3650.92 r180 top
R9 "RC0603FR-0710KL" FP-RC0603-0_55-IPC_C 2316.93,236.22 r270 top
R10 "RC0603FR-0710KL" FP-RC0603-0_55-IPC_C 4731.3,4922.24 r90 top
R11 "CRCW06035K10FKEA" FP-CRCW0603-e3-IPC_C 2415.35,133.86 r0 top
R12 "CRCW080541K2FKEA" Vishay_CRCW0805-e3_MFG 3202.83,3128.94 r90 top
R13 "ERJ-6ENF2491V" RESC2013X70X40LL20T20 3216.54,3248.03 r270 top
R14 "CRCW04025K23FKED" FP-CRCW0402-e3-IPC_C 3139.76,3275.68 r90 top
R15 "CRCW0402191KFKED" FP-CRCW0402-e3-IPC_C 2761.73,3196.85 r0 top
R16 "CRCW04021M00FKED" FP-CRCW0402-e3-MFG 3072.83,3275.59 r270 top
R17 "CSR1206FK15L0" FP-CSR1206-IPC_B 2703.72,2425.82 r90 top
R18 "AC0402FR-0786K6L" FP-AC0402-IPC_B 2768.56,3102.36 r180 top
R19 "ERJ-6ENF9761V" RESC2013X70X40ML20T20 2793.31,3354.33 r0 top
R20 "RC0603FR-0710KL" FP-RC0603-0_55-IPC_C 3001.97,352.36 r270 top
R21 "RC0603FR-073K3L" FP-RC0603-0_55-MFG 3049.21,234.25 r0 top
R22 "CRCW080541K2FKEA" Vishay_CRCW0805-e3_MFG 5175,3064 r180 top
R23 "ERJ-6ENF2491V" RESC2013X70X40LL20T20 5213.19,2991.82 r180 top
R24 "CRCW04025K23FKED" FP-CRCW0402-e3-IPC_C 5057.09,3148.39 r90 top
R25 "CRCW0402143KFKED" FP-CRCW0402-e3-IPC_A 4746.15,3044.29 r180 top
R26 "CRCW04021M00FKED" FP-CRCW0402-e3-MFG 4994.09,3149.61 r270 top
R27 "PRL1632-R007-F-T1" FP-PRL1632-IPC_C 4698.8,2437.99 r0 top
R28 "AC0402FR-0786K6L" FP-AC0402-IPC_B 4807.93,2976.38 r180 top
R29 "ERJ-6ENF9761V" RESC2013X70X40ML20T20 4739.17,2901.57 r0 top
R30 "RC0603FR-0710KL" FP-RC0603-0_55-IPC_C 4368.11,4019.68 r270 top
R31 "RC0603FR-0710KL" FP-RC0603-0_55-IPC_C 4450.79,4019.68 r270 top
R32 "RC0603FR-0710KL" FP-RC0603-0_55-IPC_C 4533.46,4019.68 r270 top
R33 "RC0603FR-0710KL" FP-RC0603-0_55-IPC_C 4612.2,4019.68 r270 top
R34 "RC0603FR-0710KL" FP-RC0603-0_55-IPC_C 4801.92,4531 r0 top
R35 "RC0603FR-0710KL" FP-RC0603-0_55-IPC_C 4820.36,4633 r0 top
R36 "RC0603FR-0710KL" FP-RC0603-0_55-IPC_C 4561.02,4937.92 r90 top
R37 "RC0603FR-0710KL" FP-RC0603-0_55-IPC_C 4482.28,4930.05 r90 top
R38 "RC0603FR-0710KL" FP-RC0603-0_55-IPC_C 4407.48,4930.05 r90 top
R40 "RC0603FR-0710KL" FP-RC0603-0_55-IPC_C 4446.85,311.02 r270 top
R41 "RC0603FR-073K3L" FP-RC0603-0_55-MFG 4509.84,177.17 r0 top
R42 "CRCW080541K2FKEA" Vishay_CRCW0805-e3_MFG 3850.39,3009.84 r90 top
R43 "ERJ-6ENF2491V" RESC2013X70X40LL20T20 3875.98,3156.5 r270 top
R44 "CRCW04025K23FKED" FP-CRCW0402-e3-IPC_C 3715.05,3083.01 r90 top
R45 "CRCW040266K5FKED" RESC1005X40X25ML05T05 3309.05,3055.12 r0 top
R46 "CRCW04021M00FKED" FP-CRCW0402-e3-MFG 3624.02,3098.43 r270 top
R47 "CSR1206FK12L0" FP-CSR1206-IPC_B 3406.72,2205 r0 top
R48 "ERJ-6ENF3242V" RESC2013X70X40ML20T20 3437.99,2909.45 r90 top
R49 "RNCF0805BTE10K4" RES_RNCF0805_STP 3482.28,3229.43 r90 top
R50 "RC0603FR-0710KL" FP-RC0603-0_55-IPC_C 3321.2,4900 r0 top
R51 "RC0603FR-0720KL" FP-RC0603-0_55-IPC_C 3557.09,185.96 r270 top
R52 "RC0603FR-0710KL" FP-RC0603-0_55-IPC_C 3528.54,340.55 r270 top
R53 "CRCW080541K2FKEA" Vishay_CRCW0805-e3_MFG 4445.24,2890.77 r90 top
R54 "ERJ-6ENF2491V" RESC2013X70X40LL20T20 4498.03,3022.64 r270 top
R55 "CRCW04025K23FKED" FP-CRCW0402-e3-IPC_C 4395.79,3019.24 r90 top
R56 "CRCW040247K5FKED" RESC1005X40X25ML05T05 3993.05,2963.52 r0 top
R57 "CSR1206FK12L0" FP-CSR1206-IPC_B 4167.32,2043.31 r0 top
R58 "ERJ-6ENF1872V" RESC2013X70X40LL20T20 4058.07,2881.89 r0 top
R59 "RNCF0805BTE10K4" RES_RNCF0805_STP 4082.75,3185.04 r0 top
R60 "CRCW04021M00FKED" FP-CRCW0402-e3-MFG 4285.43,3047.24 r270 top
RAS "CRCW1210100KFKEA" FP-CRCW1210-e3-IPC_C 573.72,190 r270 top
RAS2 "CRCW080510K0FKEAHP" RESC2013X60X40NL15T20 810.04,47.24 r180 top
RAS3 "CRCW1210100KFKEA" FP-CRCW1210-e3-IPC_C 1655.51,236.22 r270 top
RAS4 "CRCW080510K0FKEAHP" RESC2013X60X40NL15T20 1795.28,91.54 r180 top
Rb7 "ERJ-6ENF9761V" RESC2013X70X40ML20T20 2872.05,3649.61 r0 top
Rc "RC0402FR-0768K1L" RESC1005X40X25NL05T10 1812.78,4896.85 r0 top
Rc7 "CRCW0402191KFKED" FP-CRCW0402-e3-IPC_C 2751.97,3559.06 r270 top
Re7 "CRCW04021M00FKED" FP-CRCW0402-e3-MFG 2573.72,3723.56 r90 top
Ren "CRCW04021M00FKED" FP-CRCW0402-e3-MFG 2113.51,4923.85 r270 top
Rf "ERJ-6ENF1872V" RESC2013X70X40LL20T20 1831,4824.85 r0 top
RF "B2B-PH-K-SLFSN" CONN_B2B-PH-K-SLFSN_JST 5229.33,3455.71 r90 top (schematic designator RF_LINK)
Rf7 "AC0402FR-0786K6L" FP-AC0402-IPC_B 2839.42,3816.46 r0 top
Rfb "RNCF0805BTE10K4" RES_RNCF0805_STP 1782.48,5125.98 r180 top
RJ1 "CRCW08050000Z0EA" RESC2013X50X30LL20T20 4857.2,4883.78 r0 top
RJ2 "CRCW08050000Z0EA" RESC2013X50X30LL20T20 4884.84,4773.62 r270 top
RJ3 "CRCW08050000Z0EA" RESC2013X50X30LL20T20 3968.56,4307 r0 top
RJ4 "CRCW08050000Z0EA" RESC2013X50X30LL20T20 4121.56,4172.48 r90 top
RJ5 "CRCW08050000Z0EA" RESC2013X50X30LL20T20 3998.56,4157.48 r270 top
RJ6 "CRCW08050000Z0EA" RESC2013X50X30LL20T20 1545.28,232.28 r270 top
RJ7 "CRCW08050000Z0EA" RESC2013X50X30LL20T20 812.01,314.96 r0 top
RL "CRCW12060000Z0EA" FP-CRCW1206-e3-IPC_C 4698.82,3783.46 r90 top
RL1 "CRCW0805750RFKEA" RESC2013X50X30NL20T20 4344.49,349.41 r90 top
RL2 "CRCW0805750RFKEA" RESC2013X50X30NL20T20 3911.42,350.39 r90 top
RL3 "CRCW0805750RFKEA" RESC2013X50X30NL20T20 4840.55,304.13 r90 top
RL4 "CRCW0805750RFKEA" RESC2013X50X30NL20T20 3395.67,372.05 r90 top
RL5 "CRCW0805750RFKEA" RESC2013X50X30NL20T20 2844.49,249.02 r90 top
RL6 "CRCW0805750RFKEA" RESC2013X50X30NL20T20 2096.46,267.72 r90 top
RL7 "CRCW0805750RFKEA" RESC2013X50X30NL20T20 1068.9,185.04 r90 top
RL8 "CRCW0805750RFKEA" RESC2013X50X30NL20T20 369.93,785.61 r90 top
RL9 "CRCW0805750RFKEA" RESC2013X50X30NL20T20 1033.46,734.25 r90 top
RM "CRCW1210100KFKEA" FP-CRCW1210-e3-IPC_C 521.65,940.94 r180 top
RM2 "CRCW080510K0FKEAHP" RESC2013X60X40NL15T20 746.06,584.65 r180 top
RM3 "CRCW1210100KFKEA" FP-CRCW1210-e3-IPC_C 302.17,980.32 r180 top
RM4 "CRCW080510K0FKEAHP" RESC2013X60X40NL15T20 150.44,647.81 r180 top
Rs "ERJ-3RSFR15V" RESC1608X55X30ML15T15 1971.44,4171.13 r90 top
Rs7 "CSR1206FK15L0" FP-CSR1206-IPC_B 2597.44,4474.13 r180 top
RSW "RC0603FR-0710KL" FP-RC0603-0_55-IPC_C 5244.09,3227.36 r90 top (schematic designator R_SW)
Rt "CRCW04025K23FKED" FP-CRCW0402-e3-IPC_C 2182.51,4919.69 r90 top
Rt7 "CRCW04025K23FKED" FP-CRCW0402-e3-IPC_C 2504.72,3730.89 r270 top
RU1 "CRCW080541K2FKEA" Vishay_CRCW0805-e3_MFG 2297.24,4773.62 r270 top
RU2 "ERJ-6ENF2491V" RESC2013X70X40LL20T20 2302.17,4650.59 r90 top
Ru7 "CRCW080541K2FKEA" Vishay_CRCW0805-e3_MFG 2311.44,3749.13 r270 top
Ruv7 "ERJ-6ENF2491V" RESC2013X70X40LL20T20 2390.44,3752.13 r270 top
servo "1720650202" CONN_SD-768290002_02_MOL 2310.04,759.84 r180 top
servo_F "3568" FP-3568-MFG 3104.65,1413.28 r270 top
servo_L "LS L29K-H1J2-1-Z" FP-LS_L29K-MFG 3090.55,971.46 r180 top
SW2 "JS102011SCQN" FP-JS102011SCQN-MFG 3422.83,4673.43 r270 top
SW3 "FSM4JSMA" TECO-FSM4JSMA_V 4352.36,3539.37 r270 top
U1 "LM25116MHX/NOPB" PWP0020A_N 2204.72,3211 r270 top
U2 "LM25116MHX/NOPB" PWP0020A_N 2993.15,3017.86 r270 top
U3 "TLV271IDBVR" DBV0005A_M 4108.27,342.52 r0 top (schematic designator U3.3)
U3 "LM25116MHX/NOPB" PWP0020A_N 4982.39,2883.29 r270 top
U3.3_2 "TLV271IDBVR" DBV0005A_M 4132.87,163.39 r0 top
U3AS "TLV271IDBVR" DBV0005A_M 1977.36,76.77 r0 top
U4 "LM25116MHX/NOPB" PWP0020A_N 3611.74,2841.14 r270 top
U5 "TLV271IDBVR" DBV0005A_M 4595.47,305.12 r0 top (schematic designator Ufans)
U5 "LM25116MHX/NOPB" PWP0020A_N 4246.1,2771.87 r270 top
U6 "TLV271IDBVR" DBV0005A_M 4683.07,118.11 r0 top (schematic designator U2_fans)
U6 "LM25116MHX/NOPB" PWP0020A_N 2046.2,4720.22 r270 top
U7 "TLV271IDBVR" DBV0005A_M 3718.5,157.48 r0 top (schematic designator U2_5.5)
U7 "LM25116MHX/NOPB" PWP0020A_N 2620.39,3935.04 r90 top
U8 "TLV271IDBVR" DBV0005A_M 3151.57,366.14 r0 top (schematic designator Umcm)
U9 "CD40109B-Q1_NS_16" NS16_TEX 3868.97,3676.18 r0 top
U9 "TLV271IDBVR" DBV0005A_M 3673.23,358.27 r0 top (schematic designator U5.5)
U10 "TLV271IDBVR" DBV0005A_M 3235.24,173.23 r0 top (schematic designator U2_mcm)
U11 "TLV271IDBVR" DBV0005A_M 2599.41,96.46 r0 top (schematic designator U2_servo)
U12 "TLV271IDBVR" DBV0005A_M 2494.09,248.03 r0 top (schematic designator Uservo)
U13 "TLV271IDBVR" DBV0005A_M 1835.63,241.14 r0 top (schematic designator UAS_2)
U14 "TLV271IDBVR" DBV0005A_M 831.69,165.35 r0 top (schematic designator UAS_1)
U15 "TLV271IDBVR" DBV0005A_M 946.85,537.4 r0 top (schematic designator U2_MD)
U16 "TLV271IDBVR" DBV0005A_M 797.24,706.69 r0 top (schematic designator UMD_1)
U17 "TLV271IDBVR" DBV0005A_M 340.55,618.11 r0 top (schematic designator U3_MD)
U18 "TLV271IDBVR" DBV0005A_M 132.87,781.5 r0 top (schematic designator UMD_2)
U20 "TLV271IDBVR" DBV0005A_M 1222.5,151.61 r0 top (schematic designator U2AS)
UA "SN74LVC1G08DBVRG4" FP-DBV0005A-IPC_A 3517.72,3799.21 r0 top
Um1 "STM32F423RHT6" LQFP64-10X10MM 4445.03,4540.38 r90 top
Usup "TLV809EA26DBZR" SOT_26DBZR_TEX-M 4474.41,3811.02 r270 top
Y1 "ABM7-25.000MHZ-D2Y-T" FP-ABM7-MFG 3866.56,4060 r90 top
Y2 "MU00525-32.768K" FP-NX3215SA-MFG 3800.56,4253 r180 top

## Footprints (in the part's own frame and the unit in brackets; to place one, negate y for a bottom-side part, rotate by r counter-clockwise, add the part's x,y. Pads: shape width x height; smd on the part's side, far side on the other; paste and mask are expansions set on the pad)
100SP1T1_EWI [mil]
  round 80 / inner round 60 / far side round 80 hole 60 paste-99999 mask+0: 1(0,0) 2(0,-185.04) 3(0,-370.08)
  silkscreen extent -140,-440 180,70
"7461147_CHEMICAL SURFACE" [mm] "M5, blind 4mm"
  round 1.8 hole 1.475: 1(-3.81,-3.81) 1(-3.81,-1.27) 1(-3.81,1.27) 1(-3.81,3.81) 1(-1.27,-3.81) 1(-1.27,-1.27) 1(-1.27,1.27) 1(-1.27,3.81) 1(1.27,-3.81) 1(1.27,-1.27) 1(1.27,1.27) 1(1.27,3.81) 1(3.81,-3.81) 1(3.81,-1.27) 1(3.81,1.27) 1(3.81,3.81)
  body extent -4.5,-4.5 4.5,4.5, height 7
9774050482 [mm] "SMT Steel Spacer with internal Thread M4, height 5mm"
  round 9.4 / inner round 0 / far side round 0 hole 5.4 unplated: 1(0,0)
  body extent -4.1,-4.1 4.1,4.1, height 5
61301211121 [mm] "Pin Header, pitch 2.54 mm, THT, Vertical, single row, 12p"
  rrect50% 1.6x1.6 hole 1.1: 1(-13.97,0)
  round 1.6 hole 1.1: 2(-11.43,0) 3(-8.89,0) 4(-6.35,0) 5(-3.81,0) 6(-1.27,0) 7(1.27,0) 8(3.81,0) 9(6.35,0) 10(8.89,0) 11(11.43,0) 12(13.97,0)
  silkscreen extent -15.96,-1.35 15.39,1.35, body extent -15.24,-1.27 15.24,1.27, height 8.57
CAP_2012_TDK-M [mil]
  rect 30x59 smd paste+0 mask+0: 1(-50.5,0) 2(50.5,0)
  silkscreen extent -23,-34 23,34, body extent -44,-29 44,29, height 49
CAP_TMK212BJ105KG-T_TAY [mil]
  rect 44x53 smd paste+0 mask+0: 1(-33.34,0) 2(33.34,0)
  body extent -41,-26 41,26, height 53
"CAP_UMK105 CG080CV-F_TAY" [mil]
  rect 28x22 smd paste+0 mask+0: 1(-20.5,0) 2(20.5,0)
  body extent -21,-11 21,11, height 22
CAPC1005X55X25LL05T10 [mm] "Chip Capacitor, 2-Leads, Body 1.00x0.50mm, IPC High Density"
  rect 0.56x0.52 smd: 1(-0.39,0) 2(0.39,0)
  body extent -0.53,-0.28 0.53,0.28, height 0.55
CAPC1608X87X35LL15T15 [mm] "Chip Capacitor, 2-Leads, Body 1.60x0.80mm, IPC High Density"
  rect 0.8x0.9 smd: 1(-0.625,0) 2(0.625,0)
  body extent -0.87,-0.48 0.87,0.48, height 0.87
CAPC1608X90X35LL15T15 [mm] "Chip Capacitor, 2-Leads, Body 1.60x0.81mm, IPC High Density"
  rect 0.85x0.9 smd: 1(-0.65,0) 2(0.65,0)
  body extent -0.88,-0.48 0.87,0.48, height 0.9
CAPC2013X140X50LL20T25 [mm] "Chip Capacitor, 2-Leads, Body 2.00x1.25mm, IPC High Density"
  rect 1.1x1.35 smd: 1(-0.7,0) 2(0.7,0)
  body extent -1.1,-0.72 1.1,0.72, height 1.4
CON1_1X1_TU_SSQ [mil]
  round 60 hole 40 paste-99999 mask-30: 1(0,0)
  silkscreen extent -65,-50 65,55
CON_428192233 [mm]
  rect 3.3x3.3 / inner round 1.524 / far side rect 3.3x3.3 hole 2.8 paste-2539.97 mask+0.076: 11(0,0) 12(0,-4.4)
  round 3.3 / inner round 1.524 / far side round 3.3 hole 2.8 paste-2539.97 mask+0.076: 21(-10,0) 22(-10,-4.4)
  round 3 / inner round 1.524 / far side round 3 hole 3 unplated paste-2539.97 mask+0.076: M1(5.73,-3.95) M2(-15.73,-3.95)
  silkscreen extent -16.91,-9.55 6.91,4.55
"CONN2_LFBN-RC_SUL - DUPLICATE" [mil]
  round 62 / inner round 60 / far side round 62 hole 42 paste-99999 mask+0: 1(0,0) 2(100,0)
  silkscreen extent -65,-55 165,55
CONN_B2B-PH-K-SLFSN_JST [mil]
  round 52 / inner round 60 / far side round 52 hole 32 paste-99999 mask+0: 1(0,0) 2(-78.74,0)
  silkscreen extent -160,-72 82,115
CONN_SD-768290002_02_MOL [mil]
  round 93 / inner round 60 / far side round 93 hole 73 paste-99999 mask+0: 1(0,0) 2(0,224.41)
  round 73 / inner round 60 / far side round 73 hole 73 unplated paste-99999 mask-36.5: 3(-137.01,333.46)
  silkscreen extent -170,-135 170,366
CONN_SFH11-PBPC-D12-ST-BK [mil]
  round 54 / inner round 60 / far side round 54 hole 34 paste-99999 mask+0: 1(0,0) 2(0,-100) 3(100,0) 4(100,-100) 5(200,0) 6(200,-100) 7(300,0) 8(300,-100) 9(400,0) 10(400,-100) 11(500,0) 12(500,-100) 13(600,0) 14(600,-100) 15(700,0) 16(700,-100) 17(800,0) 18(800,-100) 19(900,0) 20(900,-100) 21(1000,0) 22(1000,-100) 23(1100,0) 24(1100,-100)
  silkscreen extent -155,-221 1255,73
DBV0005A_M [mm] "SOT23, 5-Leads, Body 3.05x1.75mm, Pitch 0.95mm, IPC Low Density"
  rrect15% 1.2x0.65 smd: 1(-1.475,0.95) 2(-1.475,0) 3(-1.475,-0.95) 4(1.475,-0.95) 5(1.475,0.95)
  silkscreen extent -1.6,-1.55 0.5,1.95, body extent -1.42,-1.46 1.42,1.46, height 1.08
DNK0008A [mm]
  rect 0.86x0.51 smd paste-0.05 mask-0.051: 1(-2.82,1.905) 2(-2.82,0.635) 3(-2.82,-0.635) 4(-2.82,-1.905) 5(2.82,-1.905) 6(2.82,-0.635) 7(2.82,0.635) 8(2.82,1.905)
  rect 4.34x4.6 smd paste-2.287 mask-0.051: 9(1.08,0)
  silkscreen extent -3.2,-2.7 3.2,2.7
FP-22-28-4060-MFG [mm]
  rect 1.57x1.57 hole 1.02 paste-2539.97 mask+0: 1(-6.35,0)
  round 1.57 hole 1.02 paste-2539.97 mask+0: 2(-3.81,0) 3(-1.27,0) 4(1.27,0) 5(3.81,0) 6(6.35,0)
  silkscreen extent -7.75,-1.97 7.75,1.37, body extent -7.85,-1.47 7.85,1.47, height 0.25
FP-0402-L_1_0_0_05-W_0_5-IPC_B [mil]
  rect 24.23x22.54 smd paste+0 mask+0: 1(-16.87,0) 2(16.87,0)
  silkscreen extent -29,-27 29,27, body extent -35,-17 35,17, height 10
FP-3568-MFG [mm]
  round 2.45 hole 1.6 paste-2539.97 mask+0: 1(-4.96,-1.7) 2(4.96,-1.7) 2(4.96,1.7)
  rect 2.45x2.45 hole 1.6 paste-2539.97 mask+0: 1(-4.96,1.7)
  silkscreen extent -8.72,-3.43 8.07,3.43, body extent -8.17,-3.53 8.17,3.53, height 0.25
FP-501100B00000G-MFG [mil]
  body extent -375,-125 375,125, height 190
FP-ABM7-MFG [mm]
  rect 1.9x2.6 smd paste+0 mask+0: 1(-2.15,0) 2(2.15,0)
  silkscreen extent -3.1,-1.85 3.1,1.85, body extent -3.2,-1.95 3.2,1.95, height 0.25
FP-AC0402-IPC_B [mil]
  rect 24.23x22.54 smd paste+0 mask+0: 1(-16.87,0) 2(16.87,0)
  silkscreen extent -29,-27 29,27, body extent -35,-17 35,17, height 10
FP-C0805C475K8PACTU-MFG [mm]
  rect 0.95x1.35 smd paste+0 mask+0: 1(-0.75,0) 2(0.75,0)
  silkscreen extent -1.1,-1.05 1.1,1.05, body extent -1.4,-0.85 1.4,0.85, height 0.25
FP-C0805C-DN-MFG [mm]
  rect 0.95x1.35 smd paste+0 mask+0: 1(-0.75,0) 2(0.75,0)
  silkscreen extent -1.1,-1.07 1.1,1.07, body extent -1.4,-0.85 1.4,0.85, height 0.25
FP-C1206C-EB-MFG [mm]
  rect 0.95x1.7 smd paste+0 mask+0: 1(-1.4,0) 2(1.4,0)
  silkscreen extent -0.55,-0.9 0.55,0.9, body extent -2,-1 2,1, height 0.25
FP-CGA9P-IPC_A [mm]
  rect 1.153x5.503 smd paste+0 mask+0: 1(-3.025,0) 2(3.025,0)
  silkscreen extent -2.15,-2.75 2.15,2.75, body extent -4.1,-3.25 4.1,3.25, height 0.25
FP-CRCW0402-e3-IPC_A [mil]
  rect 26.31x26.48 smd paste+0 mask+0: 1(-19.77,0) 2(19.77,0)
  silkscreen extent -33,-29 33,29, body extent -41,-21 41,21, height 10
FP-CRCW0402-e3-IPC_C [mil]
  rect 18.43x18.6 smd paste+0 mask+0: 1(-15.83,0) 2(15.83,0)
  silkscreen extent -25,-27 25,27, body extent -29,-15 29,15, height 10
FP-CRCW0402-e3-MFG [mm]
  rect 0.6x0.6 smd paste+0 mask+0: 1(-0.525,0) 2(0.525,0)
  silkscreen extent -0.53,-0.7 0.53,0.7, body extent -0.92,-0.4 0.92,0.4, height 0.25
FP-CRCW0603-e3-IPC_C [mil]
  rect 28.94x33.94 smd paste+0 mask+0: 1(-24.23,0) 2(24.23,0)
  silkscreen extent -30,-33 30,33, body extent -43,-23 43,23, height 10
FP-CRCW1206-e3-IPC_C [mil]
  rect 37.64x65.28 smd paste+0 mask+0: 1(-52.21,0) 2(52.21,0)
  silkscreen extent -19,-31 19,31, body extent -75,-38 75,38, height 10
FP-CRCW1210-e3-IPC_C [mil]
  rect 39.56x102.61 smd paste+0 mask+0: 1(-53.18,0) 2(53.18,0)
  silkscreen extent -19,-49 19,49, body extent -77,-57 77,57, height 10
FP-CSR1206-IPC_B [mil]
  rect 45.5x67.25 smd paste+0 mask+0: 1(-54.18,0) 2(54.18,0)
  silkscreen extent -20,-34 20,34, body extent -87,-43 87,43, height 10
FP-DBV0005A-IPC_A [mm]
  rect 1.805x0.612 smd paste+0 mask+0: 1(-1.15,0.95)
  rrect100% 1.805x0.612 smd paste+0 mask+0: 2(-1.15,0) 3(-1.15,-0.95) 4(1.15,-0.95) 5(1.15,0.95)
  silkscreen extent -3.03,-1.7 1.4,1.7, body extent -1.4,-1.45 1.4,1.45, height 1.45
FP-DQJ0008A-MFG [mm]
  rect 0.75x0.675 smd paste-1000 mask+0: 1(-2.752,1.905) 2(-2.752,0.635) 3(-2.752,-0.635) 4(-2.752,-1.905)
  round 3.821 smd paste-1000 mask+0: 5-6-7-8(0.35,-0.07)
  Top Layer region: 3.127,-2.242 3.127,-1.568 2.472,-1.568 2.472,-0.972 3.127,-0.972 3.127,-0.297 2.472,-0.297 2.472,0.298 3.127,0.298 3.127,0.973 2.472,0.973 2.472,1.568 3.127,1.568 3.127,2.243 -1.823,2.242 -1.823,-2.242
  silkscreen extent -3.82,-2.63 2.9,2.63, body extent -3.23,-2.6 3.23,2.6, height 0.25
FP-GCJ188-0_2-IPC_A [mil]
  rect 49.42x39.85 smd paste+0 mask+0: 1(-32.5,0) 2(32.5,0)
  silkscreen extent -57,-36 57,36, body extent -77,-40 77,40, height 10
FP-GJM155-0_05-IPC_C [mil]
  rect 20.29x18.6 smd paste+0 mask+0: 1(-14.9,0) 2(14.9,0)
  silkscreen extent -25,-27 25,27, body extent -29,-15 29,15, height 10
FP-GRM15-MFG [mm]
  rect 0.4x0.5 smd paste+0 mask+0: 1(-0.4,0) 2(0.4,0)
  silkscreen extent -0.53,-0.63 0.53,0.63, body extent -0.7,-0.38 0.7,0.38, height 0.25
FP-GRM31C-0_2-e0_3_0_8-IPC_C [mil]
  rect 45.46x67.17 smd paste+0 mask+0: 1(-50.23,0) 2(50.23,0)
  silkscreen extent -16,-35 16,35, body extent -77,-39 77,39, height 10
FP-GRM32E-0_3-0_2-IPC_C [mil]
  rect 67.04x102.61 smd paste+0 mask+0: 1(-41.36,0) 2(41.36,0)
  silkscreen extent -75,-69 75,69, body extent -79,-57 79,57, height 10
FP-GRM155-0_05-IPC_A [mil]
  rect 28.16x26.48 smd paste+0 mask+0: 1(-18.84,0) 2(18.84,0)
  silkscreen extent -33,-29 33,29, body extent -41,-21 41,21, height 10
FP-GRM155-0_05-IPC_C [mil]
  rect 20.29x18.6 smd paste+0 mask+0: 1(-14.9,0) 2(14.9,0)
  silkscreen extent -25,-27 25,27, body extent -29,-15 29,15, height 10
FP-GRM188-0_1-e0_2_0_5-MFG [mm]
  rect 0.65x0.7 smd paste+0 mask+0: 1(-0.675,0) 2(0.675,0)
  silkscreen extent -0.85,-0.75 0.85,0.75, body extent -1.1,-0.55 1.1,0.55, height 0.25
FP-GRM188-0_15-IPC_C [mil]
  rect 33.71x33.79 smd paste+0 mask+0: 1(-23.66,0) 2(23.66,0)
  silkscreen extent -41,-34 41,34
FP-HE1AN-W-DC12V-Y6-MFG [mm]
  rect 12.6x2.4 hole 1.8 slot 12 at 0 deg paste-2539.97 mask+0: 1(10,13.3)
  rrect100% 12.6x2.4 hole 1.8 slot 12 at 0 deg paste-2539.97 mask+0: 4(-10,13.3)
  rrect100% 1.8x4.2 hole 3.6 slot 1.2 at 0 deg paste-2539.97 mask+0: 5(-16,-10.2) 6(16,-10.2)
  silkscreen extent -19.15,-16.65 19.87,16.65, body extent -19,-16.5 19,16.5, height 39.1
FP-JS102011SCQN-MFG [mm]
  rect 1x2.5 smd paste+0 mask+0: 1(-2.5,-2.75) 2(0,2.75) 3(2.5,-2.75)
  silkscreen extent -4.25,-4.67 4.25,1.75, body extent -4.35,-4.1 4.35,4.1, height 0.25
FP-LS_L29K-MFG [mm]
  rect 0.8x0.8 smd paste-1000 mask+0: 1(-0.75,0) 2(0.75,0)
  silkscreen extent -1.83,-0.75 0.75,0.75, body extent -1.25,-0.55 1.25,0.55, height 0.25
FP-NX3215SA-MFG [mm]
  rect 1x1.8 smd paste+0 mask+0: 1(-1.25,0) 2(1.25,0)
  silkscreen extent -0.38,-0.8 0.38,0.8, body extent -1.85,-1 1.85,1, height 0.25
FP-OS-CON-SMT-B6-MFG [mm]
  rect 3x1.6 smd paste+0 mask+0: 1(-2.2,0) 2(2.2,0)
  silkscreen extent -4.43,-2.75 2.75,2.75, body extent -3.95,-3 3.95,3, height 0.25
FP-OS-CON-SMT-C6-MFG [mm]
  rect 3.5x1.6 smd paste+0 mask+0: 1(-2.8,0) 2(2.8,0)
  silkscreen extent -5.22,-3.4 3.4,3.4, body extent -4.8,-3.65 4.8,3.65, height 0.25
FP-PRL1632-IPC_C [mil]
  rect 37.61x130.17 smd paste+0 mask+0: 1(-22.66,0) 2(22.66,0)
  silkscreen extent -41,-83 41,83, body extent -45,-71 45,71, height 10
FP-RC0603-0_55-IPC_C [mil]
  rect 25.93x31.97 smd paste+0 mask+0: 1(-26.64,0) 2(26.64,0)
  silkscreen extent -40,-33 40,33, body extent -44,-22 44,22, height 10
FP-RC0603-0_55-MFG [mm]
  rect 0.9x0.8 smd paste+0 mask+0: 1(-0.85,0) 2(0.85,0)
  silkscreen extent 0,-0.45 0,0.45, body extent -1.4,-0.55 1.4,0.55, height 0.25
FP-XAL5030-222MEB-MFG [mm]
  rect 1.18x4.7 smd paste+0 mask+0: 1(-1.655,0) 2(1.655,0)
  silkscreen extent -2.74,-2.84 2.74,2.84, body extent -2.84,-2.94 2.84,2.94, height 0.25
IND_IHLP_5050_FD_VIS [mil]
  rect 127x195 smd paste+0 mask+0: 1(-212.5,0) 2(212.5,0)
  silkscreen extent -285,-259 285,259, body extent -270,-254 270,254, height 258
IND_MSS1038_COC [mil]
  rect 70x140 smd paste-35 mask+0: 1(-185,0) 2(185,0)
  silkscreen extent -212,-206 212,206
IND_SER1052_COC [mil]
  rect 91x118 smd paste-45.5 mask+0: 1(-175,118.11) 2(-175,-119.09)
  rect 134x125 smd paste-62.5 mask+0: 3(152.85,0)
  Top Layer region: 0,-62.5 0,-62.5 0,-62.5 0,-62.5 0,-62.5 0,-62.5 0,-62.5 0,-62.5
  Top Layer region: 0,62.5 0,62.5 0,62.5 0,62.5 0,62.5 0,62.5 0,62.5 0,62.5
  silkscreen extent -240,-210 235,210
IND_XAL6060_COC [mil]
  rect 51x197 smd paste+0 mask+0: 1(-78.5,0) 2(78.5,0)
  silkscreen extent -138,-134 138,134, body extent -133,-129 133,129, height 240
JST-B3B-PH-K-S-3_V [mm] "Connector, 3-Leads, Body 7.9x4.5mm, Pitch 2mm"
  rect 1.3x1.3 hole 0.8: 1(-2,0.55)
  round 1.3 hole 0.8: 2(0,0.55) 3(2,0.55)
  silkscreen extent -3.95,-2.25 3.95,3.4, body extent -3.95,-2.25 3.95,2.25, height 6
JST-B4B-PH-K-S_V [mm] "Connector, 4-Leads, Body 9.9x4.5mm, Pitch 2mm"
  rect 1.5x1.5 hole 1: 1(-3,0.55)
  round 1.5 hole 1: 2(-1,0.55) 3(1,0.55) 4(3,0.55)
  silkscreen extent -4.95,-2.25 4.95,2.25, body extent -4.95,-2.25 4.95,2.25, height 6
JST-S6B-PH-SM4-TB(LF)(SN)_V [mm] "SMD, 2-Leads, Body 15.9x7.6mm, Pitch 2mm"
  rect 1x3.5 smd: 1(-5,2.875) 2(-3,2.875) 3(-1,2.875) 4(1,2.875) 5(3,2.875) 6(5,2.875)
  rect 1.5x3.4 smd: MP1(-7.35,-2.875) MP2(7.35,-2.875)
  silkscreen extent -7.95,-4.37 7.95,5.3, body extent -7.95,-4.37 7.95,4.23, height 5.6
LQFP64-10X10MM [mil]
  rect 47x12 smd paste+0 mask+0: 1(-226.38,147.64) 2(-226.38,127.95) 3(-226.38,108.27) 4(-226.38,88.58) 5(-226.38,68.9) 6(-226.38,49.21) 7(-226.38,29.53) 8(-226.38,9.84) 9(-226.38,-9.84) 10(-226.38,-29.53) 11(-226.38,-49.21) 12(-226.38,-68.9) 13(-226.38,-88.58) 14(-226.38,-108.27) 15(-226.38,-127.95) 16(-226.38,-147.64) 33(226.38,-147.64) 34(226.38,-127.95) 35(226.38,-108.27) 36(226.38,-88.58) 37(226.38,-68.9) 38(226.38,-49.21) 39(226.38,-29.53) 40(226.38,-9.84) 41(226.38,9.84) 42(226.38,29.53) 43(226.38,49.21) 44(226.38,68.9) 45(226.38,88.58) 46(226.38,108.27) 47(226.38,127.95) 48(226.38,147.64)
  rect 12x47 smd paste+0 mask+0: 17(-147.64,-226.38) 18(-127.95,-226.38) 19(-108.27,-226.38) 20(-88.58,-226.38) 21(-68.9,-226.38) 22(-49.21,-226.38) 23(-29.53,-226.38) 24(-9.84,-226.38) 25(9.84,-226.38) 26(29.53,-226.38) 27(49.21,-226.38) 28(68.9,-226.38) 29(88.58,-226.38) 30(108.27,-226.38) 31(127.95,-226.38) 32(147.64,-226.38) 49(147.64,226.38) 50(127.95,226.38) 51(108.27,226.38) 52(88.58,226.38) 53(68.9,226.38) 54(49.21,226.38) 55(29.53,226.38) 56(9.84,226.38) 57(-9.84,226.38) 58(-29.53,226.38) 59(-49.21,226.38) 60(-68.9,226.38) 61(-88.58,226.38) 62(-108.27,226.38) 63(-127.95,226.38) 64(-147.64,226.38)
  silkscreen extent -273,-270 270,270, body extent -236,-236 236,236, height 63
NETTIE_SMD [mm]
  rect 1x1 smd mask-10: 1(-7.112,1.27) 2(-4.699,1.27)
  Top Layer region: -6.985,0.889 -4.953,0.889 -4.953,1.651 -6.985,1.651
NS16_TEX [mil]
  rect 85x22 smd paste-42.5 mask-42.5: 1(-133,175) 2(-133,125) 3(-133,75) 4(-133,25) 5(-133,-25) 6(-133,-75) 7(-133,-125) 8(-133,-175) 9(133,-175) 10(133,-125) 11(133,-75) 12(133,-25) 13(133,25) 14(133,75) 15(133,125) 16(133,175)
  silkscreen extent -115,-212 196,212, body extent -161,-206 161,206, height 79
ONSC-SOD-523-2-502-01_V [mm] "SOD, 2-Leads, Body 1.2x0.8mm"
  rect 0.48x0.4 smd: 1(-0.66,0) 2(0.66,0)
  silkscreen extent -0.75,-0.4 0.07,0.65, body extent -0.6,-0.4 0.6,0.4, height 0.7
POT_3296X [mil]
  round 52 / inner round 60 / far side round 52 hole 32 paste-99999 mask+0: 1(200,0) 2(100,0)
  rect 52x52 / inner round 60 / far side rect 52x52 hole 32 paste-99999 mask+0: 3(0,0)
  silkscreen extent -173,-105 292,100, body extent -112,-100 298,95, height 375
PWP0020A_N [mm] "SOP, 20-Leads, Body 6.6x4.5mm, Pitch 0.65mm, Thermal Pad 4.2x3mm, IPC Medium Density"
  rrect22% 1.4x0.45 smd: 1(-2.95,2.925) 2(-2.95,2.275) 3(-2.95,1.625) 4(-2.95,0.975) 5(-2.95,0.325) 6(-2.95,-0.325) 7(-2.95,-0.975) 8(-2.95,-1.625) 9(-2.95,-2.275) 10(-2.95,-2.925) 11(2.95,-2.925) 12(2.95,-2.275) 13(2.95,-1.625) 14(2.95,-0.975) 15(2.95,-0.325) 16(2.95,0.325) 17(2.95,0.975) 18(2.95,1.625) 19(2.95,2.275) 20(2.95,2.925)
  rrect3% 3x4.2 smd: 21(0,0)
  silkscreen extent -3.07,-3.3 1.85,3.83, body extent -3.21,-3.25 3.21,3.25, height 1
RES_RNCF0805_STP [mil]
  rect 38x55 smd paste+0 mask+0: 1(-37.5,0) 2(37.5,0)
  silkscreen extent -6,-32 6,32, body extent -43,-27 43,27, height 26
RESC1005X40X25ML05T05 [mm] "Chip Resistor, 2-Leads, Body 1.00x0.50mm, IPC Low Density"
  rect 0.65x0.65 smd: 1(-0.5,0) 2(0.5,0)
  body extent -0.53,-0.27 0.53,0.28, height 0.4
RESC1005X40X25NL05T10 [mm] "Chip Resistor, 2-Leads, Body 1.00x0.50mm, IPC Medium Density"
  rect 0.6x0.55 smd: 1(-0.425,0) 2(0.425,0)
  body extent -0.53,-0.27 0.53,0.28, height 0.4
RESC1608X55X30ML15T15 [mm] "Chip Resistor, 2-Leads, Body 1.60x0.80mm, IPC Low Density"
  rect 0.9x1.05 smd: 1(-0.725,0) 2(0.725,0)
  body extent -0.87,-0.48 0.87,0.48, height 0.55
RESC2013X50X30LL20T20 [mm] "Chip Resistor, 2-Leads, Body 2.00x1.25mm, IPC High Density"
  rect 0.85x1.35 smd: 1(-0.825,0) 2(0.825,0)
  silkscreen extent -0.1,-0.58 0.1,0.58, body extent -1.1,-0.72 1.1,0.72, height 0.5
RESC2013X50X30NL20T20 [mm] "Chip Resistor, 2-Leads, Body 2.00x1.25mm, IPC Medium Density"
  rect 1.05x1.45 smd: 1(-0.925,0) 2(0.925,0)
  silkscreen extent -0.1,-0.63 0.1,0.63, body extent -1.1,-0.72 1.1,0.72, height 0.5
RESC2013X60X40NL15T20 [mm] "Chip Resistor, 2-Leads, Body 2.00x1.25mm, IPC Medium Density"
  rect 1.1x1.4 smd: 1(-0.875,0) 2(0.875,0)
  body extent -1.07,-0.7 1.08,0.7, height 0.6
RESC2013X70X40LL20T20 [mm] "Chip Resistor, 2-Leads, Body 2.00x1.25mm, IPC High Density"
  rect 0.95x1.35 smd: 1(-0.775,0) 2(0.775,0)
  body extent -1.1,-0.72 1.1,0.72, height 0.7
RESC2013X70X40ML20T20 [mm] "Chip Resistor, 2-Leads, Body 2.00x1.25mm, IPC Low Density"
  rect 1.35x1.55 smd: 1(-0.975,0) 2(0.975,0)
  body extent -1.1,-0.72 1.1,0.72, height 0.7
SMC_DIO [mm]
  rect 2.18x3.18 smd paste+0 mask+0: 1(-3.127,0) 2(3.127,0)
  silkscreen extent -5.84,-3.24 4.19,3.24, body extent -4.07,-3.11 4.07,3.11, height 2.45
SOD523_NEX [mm]
  rect 0.911x0.391 smd paste+0 mask+0: 1(-0.725,0) 2(0.725,0)
  silkscreen extent -3.09,-0.64 0.75,0.63, body extent -0.9,-0.43 0.9,0.43, height 1.2
SOT_26DBZR_TEX-M [mil]
  rect 24x64 smd paste+0 mask+0: 1(-37.4,-42) 2(37.4,-42) 3(0,42)
  silkscreen extent -65,-33 65,33, body extent -60,-52 60,52, height 37
STA_CSNL1206_STP [mil]
  rect 38x73 smd paste+0 mask+0: 1(-57,0) 2(57,0)
  silkscreen extent -26,-42 26,42, body extent -68,-36 68,36, height 35
TECO-FSM4JSMA_V [mm] "SMD, 4-Leads, Body 6x6mm, Pitch 4.5mm"
  rect 1.4x2.1 smd: 1(2.25,4.55) 2(2.25,-4.55) 3(-2.25,4.55) 4(-2.25,-4.55)
  silkscreen extent -3,-3 3.62,4.68, body extent -3,-5 3,5, height 5.08
Vishay_CRCW0805-e3_MFG [mm]
  rect 0.95x1.45 smd paste+0 mask+0: 1(-0.975,0) 2(0.975,0)
  silkscreen extent -0.13,-0.7 0.13,0.7, body extent -1.55,-0.82 1.55,0.82, height 0.25
WE-TPC_5828 [mm] "Power Inductor, SMD, 2-Leads, body 5.8x5.8mm"
  rect 6.3x0.9 smd paste-403.566 mask-403.566: 1(0,2.7) 2(0,-2.7)
  Top Layer region: 3.15,-0.95 1.984,-0.95 1.984,-0.95 1.374,-1.718 0.491,-2.145 -0.49,-2.145 -1.374,-1.718 -1.984,-0.95 -1.984,-0.95 -3.15,-0.95 -3.15,-0.95 -3.15,-3.15 3.15,-3.15
  Top Layer region: -3.15,0.95 -1.984,0.95 -1.984,0.95 -1.374,1.718 -0.491,2.145 0.49,2.145 1.374,1.718 1.984,0.95 1.984,0.95 3.15,0.95 3.15,0.95 3.15,3.15 -3.15,3.15
  silkscreen extent -3.05,-0.65 3.05,3.77, body extent -2.9,-2.9 2.9,2.9, height 2.8

## Part data
3.3_E 3.3_LG 5_E 5_ECB 5_LG 12_E 12_ECB RF: "No Description Available", Mfr_Name=JST, RefDes=RefDes, Type=Type
3.3V_F 5.5V_F AS2_F AS_F Fans_F MCM_F MD2_F MD_F servo_F: library part CMP-2000-05464-2, Color=Black, Current Rating=20A, Flammability Rating="UL94 V-0", Max Operating Temperature=145°C, Min Operating Temperature=-50°C, Voltage=500V, Approvals=UL, Body Material=Nylon, Contact Material=Brass, Contact Plating=Tin, Depth=6.73mm, Fuse Current=20A, Illumination Type=Illuminated, Lead Free="Lead Free", Length=16mm, Material="Brass, Nylon, Tin", Mount="PCB, Vertical", NexarPartId=8116161, Number of Circuits=1, Number of Poles=1, Orientation=Vertical, REACH SVHC="No SVHC", RoHS=Compliant, Termination="PC Pin", Voltage Rating (AC)=500V
3.3V_L 5.5V_L AS2_L AS_L F_L MCM_L MD2_L MD_L servo_L: library part CMP-62016-000041-1, "LED RED DIFFUSED 0603 SMD", Case/Package=SMD/SMT, Color=Red, Forward Current=20mA, Forward Voltage=2.2V, Max Operating Temperature=100°C, Min Operating Temperature=-40°C, Reverse Voltage=12V, Test Current=2mA, Depth=0.8mm, Dominant Wavelength=630nm, Lead Free="Lead Free", Length=1.3mm, Lens Style=Diffused, Luminous Flux=0.02lm, Luminous Intensity=7.1mcd, Mount="Surface Mount", Number of Elements=1, Number of LEDs=1, Number of Pins=2, Packaging="Tape and Reel", Radiation Hardening=No, Viewing Angle=160°, Wavelength=643nm, Width=800um
- P+fans: library part CMP-1502-01086-3, Color=Black, Contact Resistance=20mΩ, Current Rating=3A, Operating Supply Voltage=250V, Connector Type="Male Pin", Contact Material=Copper, Contact Mating Length=5.9944mm, Contact Plating=Gold, Gender=Male, Lead Pitch=2.54mm, Mount="Through Hole", NexarPartId=32855538, Number of Contacts=12, Number of Pins=12, Number of Positions=12, Number of Rows=1, Orientation=Vertical, Packaging=Bulk, Pitch=2.54mm, REACH SVHC=Unknown, RoHS=Compliant, Termination=Solder
AS_1 AS_2 Fans MCM MD_1 MD_2 servo: "No Description Available", Mfr_Name="Molex Connector Corporation", RefDes=RefDes, Type=Type
C1 C2 C3 C4 C50 C52: library part CMP-2006-04390-1, Manufacturer="AVX Interconnect / Elco", Part Number=06035C104KAT4A
C13: library part CMP-2006-02523-2, "Chip Multilayer Ceramic Capacitors for General Purpose, 0603, 4.7uF, X5R, 15%, 10%, 25V", Capacitance=4.7uF, Case Code (Imperial)=0603, Case Code (Metric)=1608, Dielectric=X5R, Max Operating Temperature=85°C, Min Operating Temperature=-55°C, Package Quantity=4000, Tolerance=10%, Voltage=25V, Case/Package=0603, Depth=0.8mm, Height=0.8mm, Lead Free="Lead Free", Length=1.6mm, Material=Ceramic, Mount="Surface Mount", Packaging="Cut Tape", REACH SVHC="No SVHC", Thickness=0.031inch, Voltage Rating=25V, Voltage Rating (DC)=25V, Width=0.031inch
C14 C61 C69 C78 Ci6 Ci7 Cin2: library part CMP-1037-04923-3, "Chip Multilayer Ceramic Capacitors for General Purpose, 1206, 4.7uF, X7R, 15%, 10%, 50V", Capacitance=4.7uF, Case Code (Imperial)=1206, Case Code (Metric)=3216, Dielectric=X7R, Max Operating Temperature=125°C, Min Operating Temperature=-55°C, Package Quantity=2000, Tolerance=10%, Voltage=50V, Case/Package=1206, Depth=1.6mm, Height=1.6mm, Lead Free="Lead Free", Length=3.2mm, Material=Ceramic, Mount="Surface Mount", Packaging="Tape and Reel", Radiation Hardening=No, REACH SVHC="No SVHC", Termination=SMD/SMT, Thickness=0.071inch, Voltage Rating=50V, Voltage Rating (DC)=50V, Width=0.063inch
C15 C62 C70 C79 Cinx2 Cx6 Cx7: library part CMP-1036-04423-3, "CAP CER 0.1UF 50V X7R 0805", Capacitance="0.10 μF", Manufacturer=KEMET, Package=C0805C-DN, Temperature="-55°C to +125°C", Temperature Characteristic=X7R, Temperature Coefficient=30ppm/°C, Temperature Range High=+125°C, Temperature Range Low=-55°C, Tolerance=0.2, Voltage Rating="50 V", Automotive=No, Category=Cap, ComponentLink2Description=Datasheet, ComponentLink2URL=https://content.kemet.com/datasheets/KEM_C1003_C0G_SMD.pdf, Device Class L1="Passive Components", Device Class L2=Capacitors, Device Class L3="Ceramic Capacitors", Digikey Description="CAP CER 0.1UF 50V X7R 0805", Height=0.88mm, Ipc Land Pattern Name=CAPC200125X78, Lead Free=Yes, Manufacturer Part Number=C0805C104M5RACTU, Material=Ceramic, Mouser Description="Multilayer Ceramic Capacitors MLCC - SMD/SMT 50volts 0.1uF X7R 20%", Octopart=https://octopart.com/c0805c104m5ractu-kemet-129379, RoHS=TRUE
C16: library part CMP-2008-04334-1, Manufacturer=Murata, Part Number=GRM1555C1H301GA01D